# Altium PCB Smart_lockV1.1.PcbDoc (part 1 of 2)
Units mil, origin at the board's own origin, x right, y up, seen from the top; angles counter-clockwise.
Board outline 1820 x 1755 mil, 4 copper layers (Top Layer, Layer 1, Layer 2, Bottom Layer), stack 62.449 mil thick; 74 components, 60 nets, 291 pads, 502 vias.
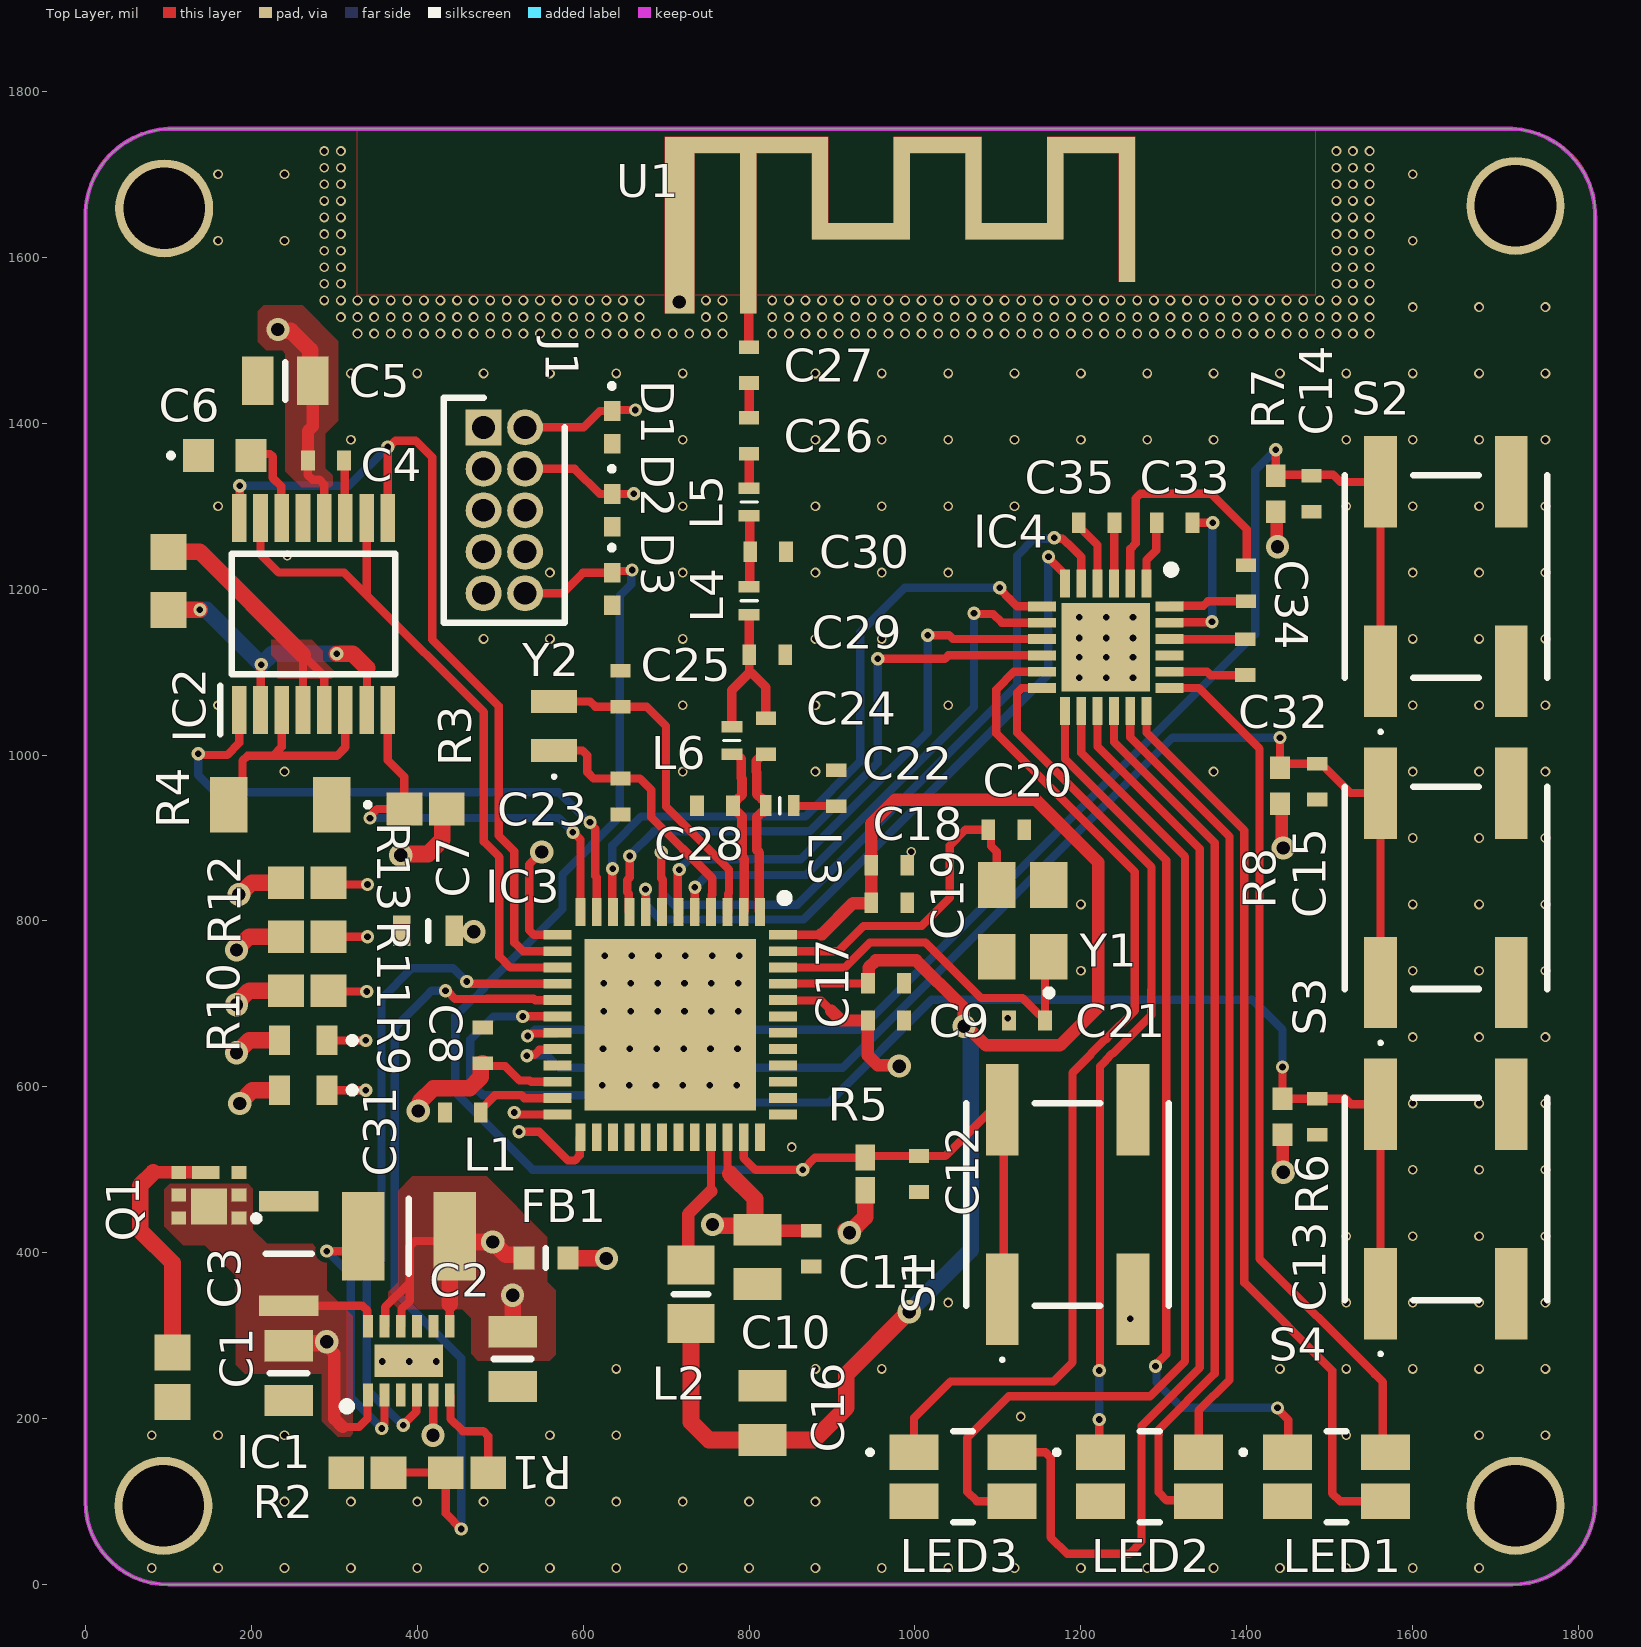
[diagram p0: Top Layer view]
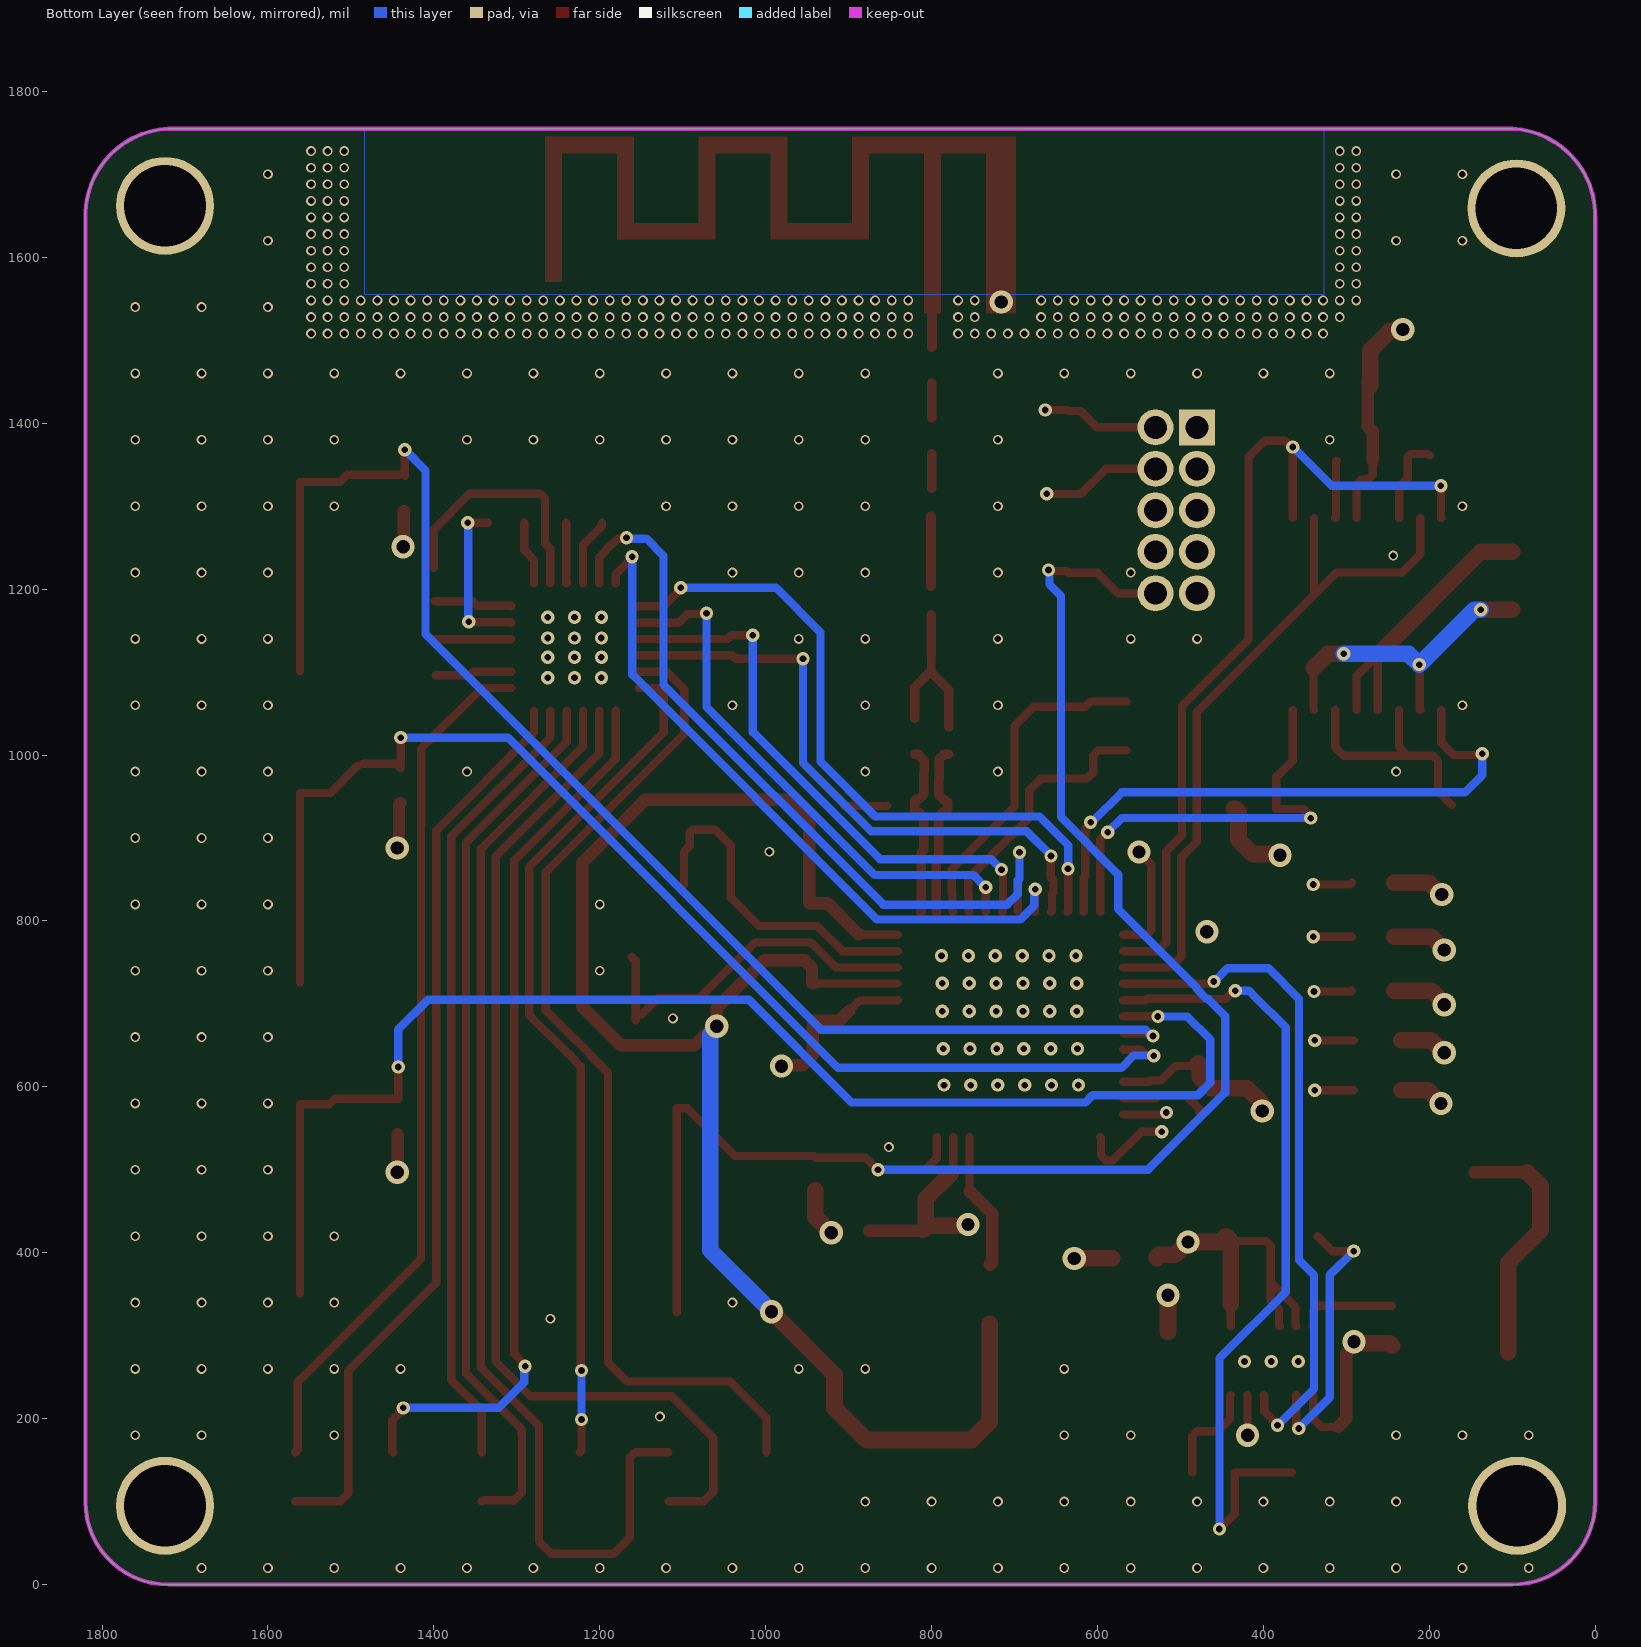
[diagram p1: Bottom Layer view, seen from below]
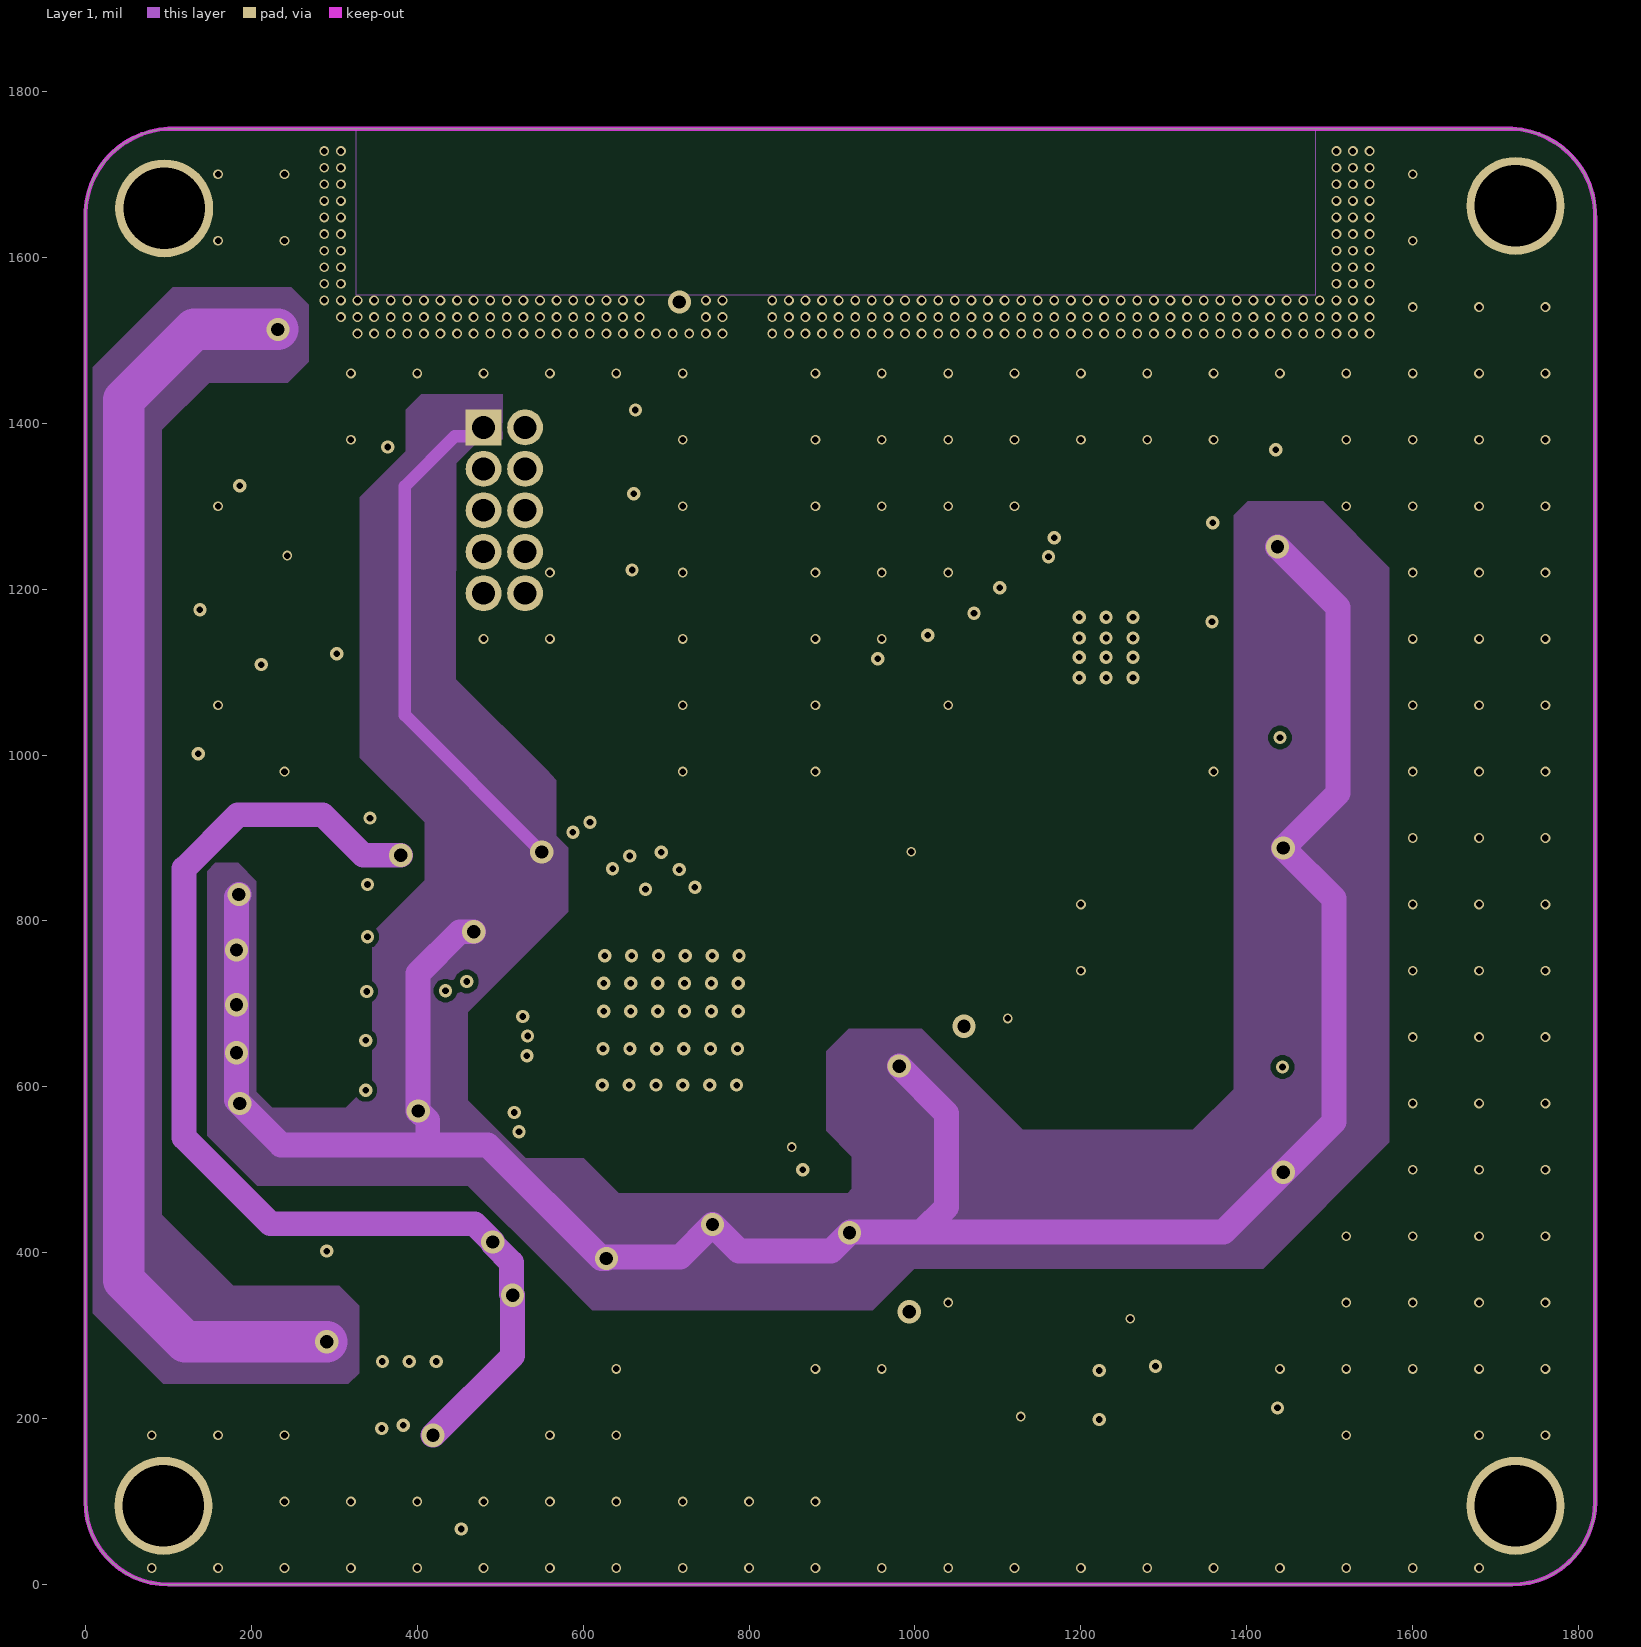
[diagram p2: Layer 1]
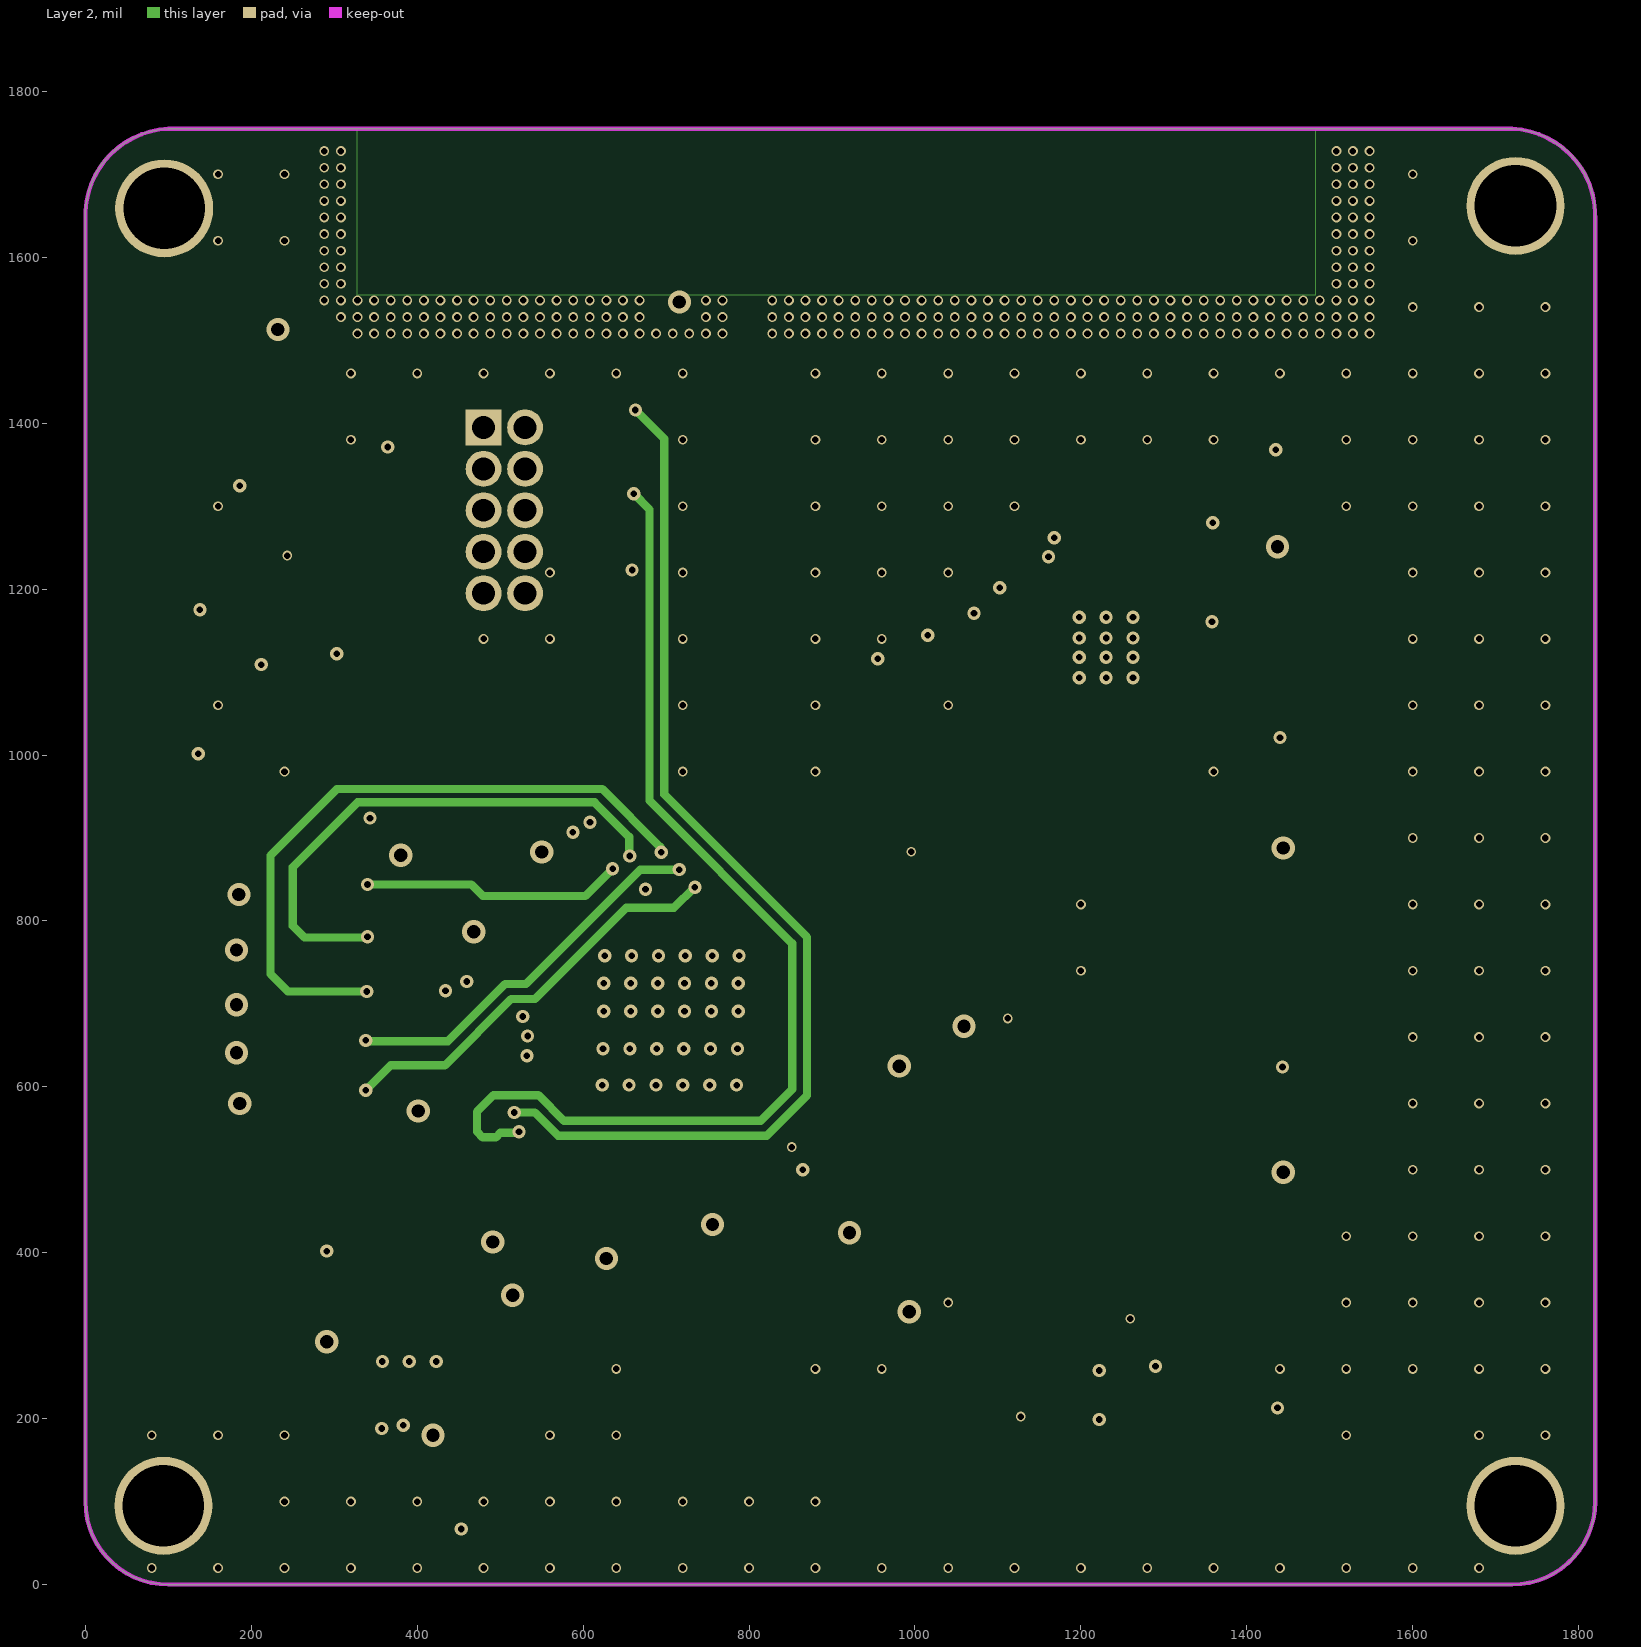
[diagram p3: Layer 2]
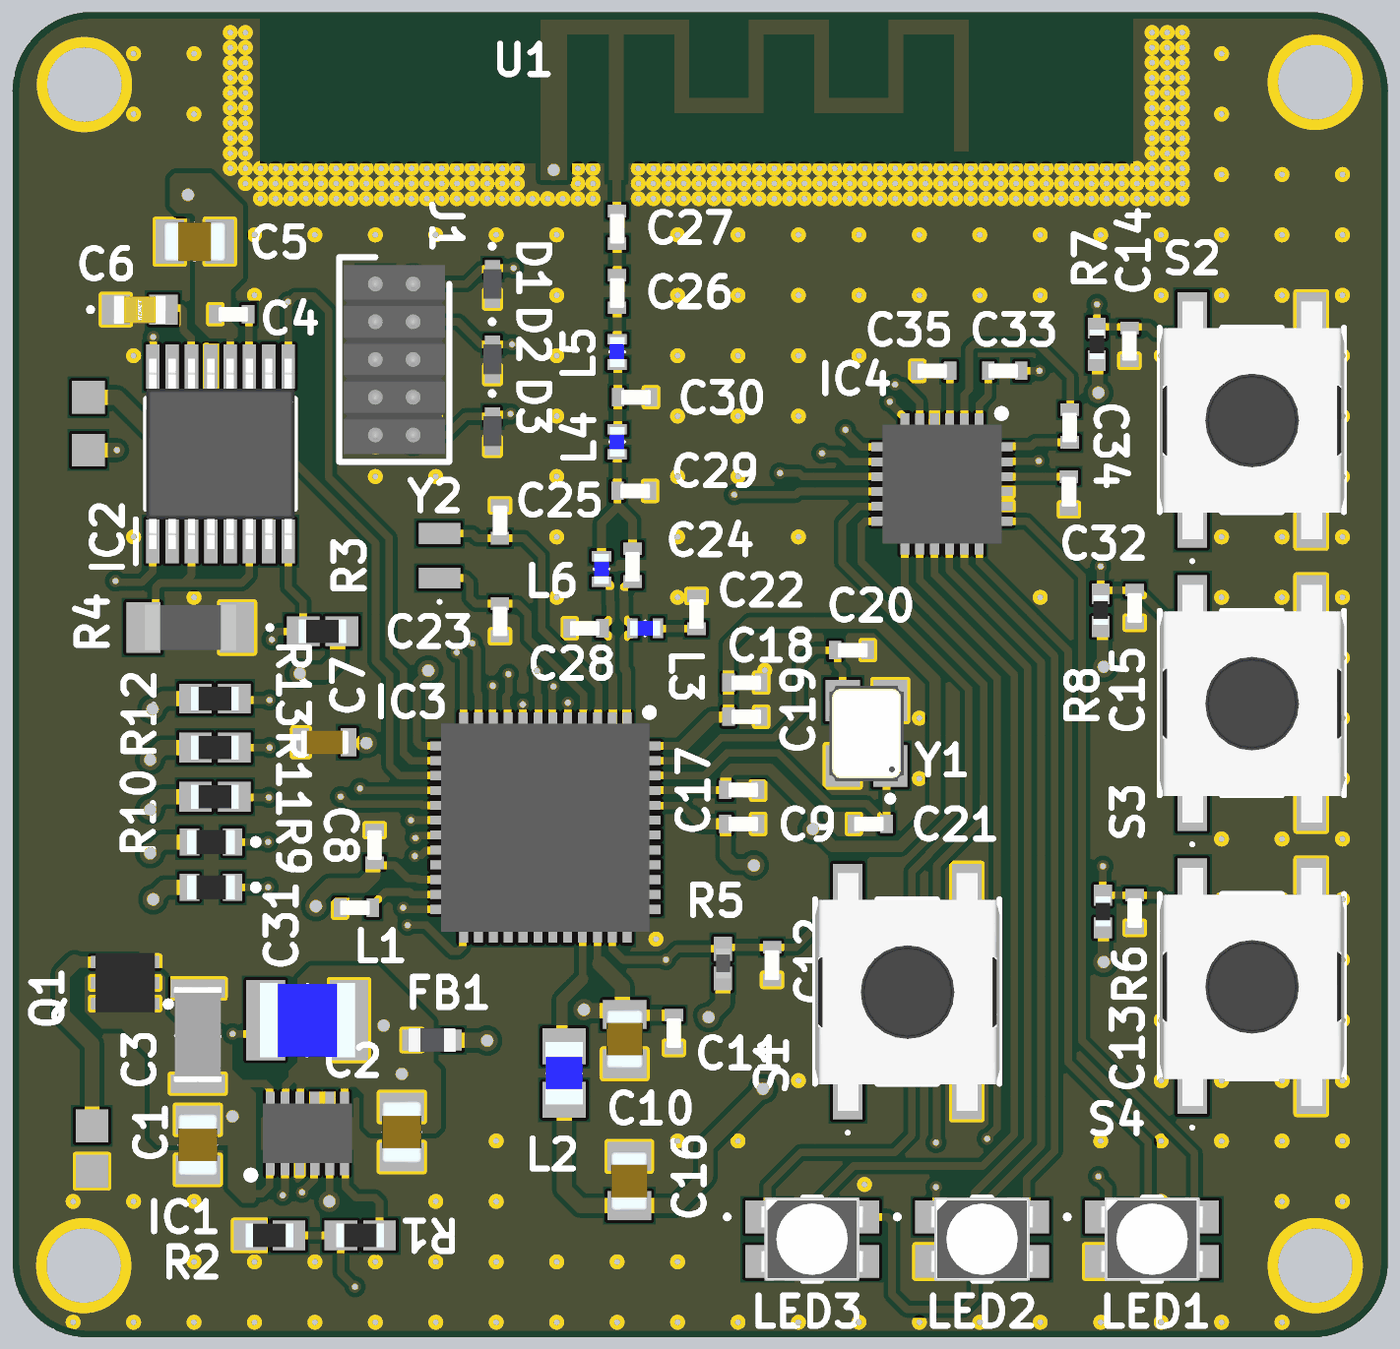
[diagram p4: 3D render of the assembled board from above, using the file's embedded part models]

## Layer stack, top to bottom
Top Solder: solder mask 0.4, Solder Resist, Dk 3.5
Top Layer: signal copper 1.378
Dielectric 2: prepreg 8.2835, PP-006, Dk 4.1
Layer 1: signal copper 0.5984
Dielectric 1: dielectric 41.9291, FR-4, Dk 4.8
Layer 2: signal copper 0.5984
Dielectric 3: prepreg 8.2835, PP-006, Dk 4.1
Bottom Layer: signal copper 1.378
Bottom Solder: solder mask 0.4, Solder Resist, Dk 3.5

## Board outline
1720,0 ccw(c1720,100) 1820,100 1820,1645 ccw(c1715,1650) 1720,1755 100,1755 ccw(c105,1650) 0,1645 0,100 ccw(c100,100) 100,0 200,0

## Design rules (kind name [scope] priority, off if disabled: settings)
Clearance [All] p1: gap=6 ignorepadtopadclearanceinfootprint=TRUE
DiffPairsRouting [All] p1: maxlimit=10 minlimit=8 mostfreqgap=8 toplayer_minwidth=10 toplayer_maxwidth=13 toplayer_prefwidth=10 midlayer1_minwidth=10 midlayer1_maxwidth=13 midlayer1_prefwidth=10 midlayer2_minwidth=10 midlayer2_maxwidth=13 midlayer2_prefwidth=10 bottomlayer_minwidth=10 bottomlayer_maxwidth=13 bottomlayer_prefwidth=10 maxuncoupledlength=500
MinimumSolderMaskSliver [All] p1: minsoldermaskwidth=4
PlaneConnect [All] p1: planeconnectstyle=Direct reliefexpansion=20 reliefentries=4 reliefconductorwidth=10 reliefairgap=10
PolygonConnect PolygonConnect_6 [All vs IsNamedPolygon('6V_L01_P002')] p1: connectstyle=Direct reliefconductorwidth=10 reliefentries=4 polygonreliefangle="90 Angle" airgapwidth=10
PolygonConnect PolygonConnect_5 [All vs IsNamedPolygon('6V_L01_P002')] p2: connectstyle=Direct reliefconductorwidth=10 reliefentries=4 polygonreliefangle="90 Angle" airgapwidth=10
PolygonConnect PolygonConnect_4 [All vs IsNamedPolygon('6V_L01_P002')] p3: connectstyle=Direct reliefconductorwidth=10 reliefentries=4 polygonreliefangle="90 Angle" airgapwidth=10
PolygonConnect PolygonConnect_3 [All vs IsNamedPolygon('6V_L01_P002')] p4: connectstyle=Direct reliefconductorwidth=10 reliefentries=4 polygonreliefangle="90 Angle" airgapwidth=10
PolygonConnect PolygonConnect_2 [All vs IsNamedPolygon('6V_L01_P001')] p5: connectstyle=Direct reliefconductorwidth=10 reliefentries=4 polygonreliefangle="90 Angle" airgapwidth=10
PolygonConnect PolygonConnect_1 [All vs IsNamedPolygon('OUT2_L01_P000')] p6: connectstyle=Direct reliefconductorwidth=10 reliefentries=4 polygonreliefangle="90 Angle" airgapwidth=10
PolygonConnect [All] p7: connectstyle=Direct reliefconductorwidth=10 reliefentries=4 polygonreliefangle="90 Angle" airgapwidth=10
RoutingVias [All] p1: holewidth=8 width=12 viastyle="Through Hole" minholewidth=8 minwidth=12 maxholewidth=28 maxwidth=50
SilkToSolderMaskClearance [IsPad] p1: minsilkscreentomaskgap=4 clearancetoexposedcopper=TRUE
SolderMaskExpansion [All] p1: expansion=4 istentingtop=FALSE
SupplyNets "Schematic Supply Nets_6" [InNet('VDDS')] p1: voltage=0.000
SupplyNets "Schematic Supply Nets_5" [InNet('6V')] p2: voltage=0.000
SupplyNets "Schematic Supply Nets_4" [InNet('GND')] p3: voltage=0.000
SupplyNets "Schematic Supply Nets_3" [InNet('3V')] p4: voltage=0.000
SupplyNets "Schematic Supply Nets_2" [InNet('VDDR')] p5: voltage=0.000
SupplyNets "Schematic Supply Nets_1" [InNet('VBATT')] p6: voltage=0.000
SupplyNets "Schematic Supply Nets" [InNet('VDD_LED')] p7: voltage=0.000
Width [All] p1: maxlimit=60 minlimit=10 preferedwidth=10 minimp=50.000000 maximp=50.000000 favimp=50.000000
26 further rules are at their usual default settings.

## Classes and differential pairs
differential pair RF: +RF_p -RF_n

## Components (designator, comment, footprint, x,y, rotation, side; value= is the part's Value field where it differs from the comment)
C1 "10uF" CAPC2114X145N 245,255 r90 top locked
C2 "10uF" CAPC2114X145N 515,271.93 r90 top
C3 "100uF" CAPC3216X180N 245,399 r270 top locked
C4 "0.01uF" CAPC1005X55N 290,1355 r180 top locked
C5 "10uF" CAPC2114X145N 241,1451 r180 top locked
C6 "2.2uF" C0603 168,1361 r0 top locked
C7 "C1608X5R1A106M080AC" CAPC1608X80N 413,788 r0 top locked
C8 "0.1uF" CAPC1005X55N 479,650 r270 top locked
C9 "0.1uF" CAPC1005X55N 965,680 r180 top locked
C10 "10uF" CAPC2012X145N 810,395 r90 top locked
C11 "0.1uF" CAPC1005X55N 875,405 r90 top locked
C12 "0.1uF" CAPC1005X55N 1005,495 r90 top locked
C13 "2200pF" CAPC1005X55N 1485,564 r90 top locked
C14 "2200pF" CAPC1005X55N 1478,1315 r90 top locked
C15 "2200pF" CAPC1005X55N 1485,968 r90 top locked
C16 "10uF" CAPC2012X145N 816,207 r270 top locked
C17 "0.1uF" CAPC1005X55N 965,725 r180 top locked
C18 "0.1uF" CAPC1005X55N 969,822 r180 top
C19 "885012205037" CAPC1005X55N 969,867 r180 top
C20 "GJM1555C1H1R0BB01J" CAPC1005X55N 1110,910 r180 top locked
C21 "GJM1555C1H1R0BB01J" CAPC1005X55N 1135,680 r0 top locked
C22 "6.8pF" CAPC1005X55N 905,960 r90 top locked
C23 "12pF" CAPC1005X55N 645,950 r90 top locked
C24 "1pF" CAPC1005X55N 820.28,1022.57 r90 top locked
C25 "12pF" CAPC1005X55N 645,1080 r270 top locked
C26 "12pF" CAPC1005X55N 800,1385 r90 top locked
C27 "1.8pF" CAPC1005X55N 800,1470 r90 top locked
C28 "1pF" CAPC1005X55N 759,939 r0 top locked
C29 "GRM1555C1H1R2CA01D" CAPC1005X55N 822,1121 r180 top locked
C30 "1pF" CAPC1005X55N 823,1245 r180 top locked
C31 "1uF" CAPC1005X55N 455,569 r0 top locked
C32 "1uF" CAPC1005X55N 1398,1118 r270 top locked
C33 "0.47uF" CAPC1005X55N 1313,1280 r0 top locked
C34 "0.47uF" CAPC1005X55N 1399,1207 r90 top locked
C35 "1uF" CAPC1005X55N 1219,1280 r0 top locked
D1 "TPD1E10B06DPYR" TPD1E10B06DPYR 635,1395 r270 top locked
D2 "TPD1E10B06DPYR" TPD1E10B06DPYR 635,1295 r270 top locked
D3 "TPD1E10B06DPYR" TPD1E10B06DPYR 635,1200 r270 top locked
FB1 "BLM18HE152SN1D" BLM18SP221SN1B 555.16,393.66 r0 top locked
IC1 "TPS62745DSSR" SON50P200X300X80-13N 390,270 r90 top locked
IC2 "DRV8833PWPR" SOP65P640X120-16N 275,1170 r90 top locked
IC3 "CC2640R2FTWRGZTQ1" QFN50P700X700X100-49N-D 705,675 r270 top locked
IC4 "LP55231SQX_NOPB" QFN50P400X400X80-25N 1230,1130 r270 top locked
J1 "GRPB052VWVN-RC" HDRV10W50P127_2X5_635X340X430P 480,1395 r270 top locked
L1 "4.7uF" INDC3225X270N 390,420 r0 top locked
L2 "10uH" INDC2112X145N 730,350 r270 top locked
L3 "2.4nH" LQG15WH0N7B02D 837,939 r0 top locked
L4 "2nH" LQG15WH0N7B02D 800,1186 r90 top locked
L5 "2nH" LQG15WH0N7B02D 800,1305 r90 top locked
L6 "2.4nH" LQG15WH0N7B02D 779.28,1017.57 r270 top locked
LED1 "ASMB-MTB1-0B3A2" ASMBMTB10B3A2 1508,130 r270 top
LED2 "ASMB-MTB1-0B3A2" ASMBMTB10B3A2 1283,130 r270 top
LED3 "ASMB-MTB1-0B3A2" ASMBMTB10B3A2 1058,130 r270 top
Q1 "CSD25310Q2" CSD17313Q2 148.78,469.44 r90 top locked
R1 "38.3k" RESC1608X55N 460,135 r180 top locked
R2 "30k" RESC1608X55N 340,135 r0 top locked
R3 "1k" RESC1608X55N 410,935 r0 top locked
R4 "0.1R" CSR1206 235,940 r180 top locked
R5 "100k" RESC1005X35N 940,495 r270 top locked
R6 "47.5k" RESC1005X40N 1443,564 r270 top locked
R7 "47.5k" RESC1005X40N 1435,1315 r270 top locked
R8 "47.5k" RESC1005X40N 1440,963 r270 top locked
R9 "4.7k" ERJ3EKF1000V 262.59,596 r180 top
R10 "4.7k" ERJ3EKF1000V 262.59,656 r180 top
R11 "2.2k" RESC1608X55N 267.59,716 r180 top
R12 "10k" RESC1608X55N 267.59,781 r180 top
R13 "10k" RESC1608X55N 267.59,846 r180 top
S1 "EL2_35_20J_LFS" EL23520JLFS 1184,458 r90 top locked
S2 "EL2_35_20J_LFS" EL23520JLFS 1640,1215 r90 top locked
S3 "EL2_35_20J_LFS" EL23520JLFS 1640,840 r90 top locked
S4 "EL2_35_20J_LFS" EL23520JLFS 1640,465 r90 top locked
U1 "2.4 GHz, 50 0hm" ANT_IFA_USB_2_4GHZ_50R 716.32,1532.54 r0 top
Y1 "TSX-3225_24.0000MF20G-AC3" TSX-3225 1130,800 r90 top locked
Y2 "FC-12M32.7680KA-A5" FC12M327680KAA5 565,1035 r90 top locked

## Footprints (in the part's own frame and the unit in brackets; to place one, negate y for a bottom-side part, rotate by r counter-clockwise, add the part's x,y. Pads: shape width x height; smd on the part's side, far side on the other; paste and mask are expansions set on the pad)
ANT_IFA_USB_2_4GHZ_50R [mm]
  rect 5x0.5 smd paste-2539.97 mask+0.102: 1(2.05,5.15)
  rect 0.5x4.9 smd paste-2539.97 mask+0.102: 1(2.1,2.45)
  rect 0.5x2.64 smd paste-2539.97 mask+0.102: 1(4.3,3.58) 1(6.8,3.58) 1(9,3.58) 1(11.5,3.58)
  rect 2x0.5 smd paste-2539.97 mask+0.102: 1(5.55,2.51) 1(10.25,2.51)
  rect 2.7x0.5 smd paste-2539.97 mask+0.102: 1(7.9,5.15) 1(12.6,5.15)
  rect 0.5x3.94 smd paste-2539.97 mask+0.102: 1(13.7,2.93)
  rect 0.9x4.9 smd paste-2539.97 mask+0.102: 2(0,2.45)
  Top Layer region: -0.45,0.001 -0.45,5.4 4.55,5.4 4.55,2.76 6.55,2.76 6.55,2.76 6.55,5.4 9.25,5.4 9.25,2.76 11.25,2.76 11.25,5.4 13.95,5.4 13.95,0.96 13.45,0.96 13.45,4.9 11.747,4.9 11.747,2.26 8.75,2.26 8.75,4.896 8.75,4.9 7.049,4.9 7.05,2.26 4.05,2.26 4.05,4.897 4.05,4.9 2.35,4.9 2.35,0 1.85,0 1.85,4.896 1.85,4.9 0.45,4.9 0.45,0 0.446,0 -0.45,0
ASMBMTB10B3A2 [mm]
  rect 1.1x1.5 smd: 1(-0.75,-1.5) 2(-0.75,1.5) 3(0.75,1.5) 4(0.75,-1.5)
  silkscreen extent -1.4,-2.9 1.4,0.3, body extent -1.4,-1.74 1.4,1.74, height 1.9
BLM18SP221SN1B [mm]
  rect 0.65x0.7 smd: 1(-0.675,0) 2(0.675,0)
  silkscreen extent 0,-0.3 0,0.3, body extent -0.8,-0.4 0.8,0.4, height 0.8
C0603 [mm]
  rect 0.95x1 smd: 1(-0.8,0) 2(0.8,0)
  silkscreen extent -1.7,-0.05 -1.6,0.05, body extent -0.87,-0.48 0.88,0.47, height 0.87
CAPC1005X55N [mm]
  rect 0.42x0.62 smd: 1(-0.55,0) 2(0.55,0)
  body extent -0.55,-0.25 0.45,0.25, height 0.51
CAPC1608X80N [mm]
  rect 0.54x0.94 smd: 1(-0.8,0) 2(0.8,0)
  silkscreen extent 0,-0.3 0,0.3, body extent -0.8,-0.4 0.8,0.4, height 0.8
CAPC2012X145N [mm]
  rect 0.97x1.47 smd: 1(-0.83,0) 2(0.83,0)
  body extent -1,-0.63 1,0.63, height 1.45
CAPC2114X145N [mm]
  rect 0.96x1.49 smd: 1(-0.84,0) 2(0.84,0)
  silkscreen extent 0,-0.58 0,0.58, body extent -1.05,-0.67 1.05,0.67, height 1.45
CAPC3216X180N [mm]
  rect 0.62x1.82 smd: 1(-1.6,0) 2(1.6,0)
  silkscreen extent 0,-0.7 0,0.7, body extent -1.65,-0.8 1.55,0.8, height 1.6
CSD17313Q2 [mm]
  rect 0.4x0.455 smd: 1(-0.7,-0.923) 2(0,-0.923) 3(0.7,-0.923) 4(0.7,0.923) 5(0,0.923) 6(-0.7,0.923)
  rect 0.4x0.85 smd: 7(0.7,0.096)
  rect 1.1x1.1 smd: 8(-0.35,0)
  silkscreen extent -0.78,-1.52 -0.65,-1.39, body extent -1,-1 1,1, height 0.8
CSR1206 [mm]
  rect 1.15x1.7 smd: 1(-1.575,0) 2(1.575,0)
  silkscreen extent -2.73,-0.05 -2.63,0.05, body extent -1.53,-0.78 1.52,0.77, height 0.55
EL23520JLFS [mm]
  rect 2.8x1 smd: 1(-2.9,2) 2(-2.9,-2) 3(2.9,-2) 4(2.9,2)
  silkscreen extent -4.8,-3.1 3.1,3.1, body extent -4.02,-3.11 3.98,3.09, height 3.5
ERJ3EKF1000V [mm]
  rect 0.65x0.9 smd: 1(-0.725,0) 2(0.725,0)
  silkscreen extent -1.6,-0.1 -1.4,0.1, body extent -0.8,-0.4 0.8,0.4, height 0.45
FC12M327680KAA5 [mm]
  rect 0.7x1.4 smd: 1(-0.75,0) 2(0.75,0)
  silkscreen extent -1.6,-0.05 -1.5,0.05
HDRV10W50P127_2X5_635X340X430P [mm]
  rect 1.1x1.1 hole 0.7: 1(0,0)
  round 1.1 hole 0.7: 2(0,1.27) 3(1.27,0) 4(1.27,1.27) 5(2.54,0) 6(2.54,1.27) 7(3.81,0) 8(3.81,1.27) 9(5.08,0) 10(5.08,1.27)
  silkscreen extent -0.9,-1.21 5.98,2.48, body extent -0.64,-1.06 5.71,2.33, height 4.3
INDC2112X145N [mm]
  rect 1.2x1.45 smd: 1(-0.9,0) 2(0.9,0)
  silkscreen extent 0,-0.53 0,0.53, body extent -1.05,-0.63 1.05,0.63, height 1.45
INDC3225X270N [mm]
  rect 1.3x2.7 smd: 1(-1.4,0) 2(1.4,0)
  silkscreen extent 0,-1.15 0,1.15, body extent -1.6,-1.25 1.6,1.25, height 2.7
LQG15WH0N7B02D [mm]
  rect 0.35x0.65 smd: 1(-0.425,0) 2(0.425,0)
  silkscreen extent 0,-0.25 0,0.25, body extent -0.5,-0.25 0.5,0.25, height 0.55
QFN50P400X400X80-25N [mm]
  rect 0.85x0.3 smd: 1(-1.95,1.25) 2(-1.95,0.75) 3(-1.95,0.25) 4(-1.95,-0.25) 5(-1.95,-0.75) 6(-1.95,-1.25) 13(1.95,-1.25) 14(1.95,-0.75) 15(1.95,-0.25) 16(1.95,0.25) 17(1.95,0.75) 18(1.95,1.25)
  rect 0.3x0.85 smd: 7(-1.25,-1.95) 8(-0.75,-1.95) 9(-0.25,-1.95) 10(0.25,-1.95) 11(0.75,-1.95) 12(1.25,-1.95) 19(1.25,1.95) 20(0.75,1.95) 21(0.25,1.95) 22(-0.25,1.95) 23(-0.75,1.95) 24(-1.25,1.95)
  rect 2.7x2.7 smd: 25(0,0)
  silkscreen extent -2.5,1.88 -2.25,2.13, body extent -2,-2 2,2, height 0.8
QFN50P700X700X100-49N-D [mm]
  rect 0.85x0.3 smd: 1(-3.45,2.75) 2(-3.45,2.25) 3(-3.45,1.75) 4(-3.45,1.25) 5(-3.45,0.75) 6(-3.45,0.25) 7(-3.45,-0.25) 8(-3.45,-0.75) 9(-3.45,-1.25) 10(-3.45,-1.75) 11(-3.45,-2.25) 12(-3.45,-2.75) 25(3.45,-2.75) 26(3.45,-2.25) 27(3.45,-1.75) 28(3.45,-1.25) 29(3.45,-0.75) 30(3.45,-0.25) 31(3.45,0.25) 32(3.45,0.75) 33(3.45,1.25) 34(3.45,1.75) 35(3.45,2.25) 36(3.45,2.75)
  rect 0.3x0.85 smd: 13(-2.75,-3.45) 14(-2.25,-3.45) 15(-1.75,-3.45) 16(-1.25,-3.45) 17(-0.75,-3.45) 18(-0.25,-3.45) 19(0.25,-3.45) 20(0.75,-3.45) 21(1.25,-3.45) 22(1.75,-3.45) 23(2.25,-3.45) 24(2.75,-3.45) 37(2.75,3.45) 38(2.25,3.45) 39(1.75,3.45) 40(1.25,3.45) 41(0.75,3.45) 42(0.25,3.45) 43(-0.25,3.45) 44(-0.75,3.45) 45(-1.25,3.45) 46(-1.75,3.45) 47(-2.25,3.45) 48(-2.75,3.45)
  rect 5.25x5.25 smd: 49(0,0)
  silkscreen extent -4,3.38 -3.75,3.63, body extent -3.5,-3.5 3.5,3.5, height 1
RESC1005X35N [mm]
  rect 0.8x0.6 smd: 1(-0.5,0) 2(0.5,0)
  body extent -0.5,-0.25 0.5,0.25, height 0.3
RESC1005X40N [mm]
  rect 0.7x0.6 smd: 1(-0.55,0) 2(0.55,0)
  body extent -0.5,-0.25 0.5,0.25, height 0.4
RESC1608X55N [mm]
  rect 1.1x1 smd: 1(-0.65,0) 2(0.65,0)
  body extent -0.8,-0.4 0.8,0.4, height 0.55
SON50P200X300X80-13N [mm]
  rect 0.7x0.3 smd: 1(-1.05,1.25) 2(-1.05,0.75) 3(-1.05,0.25) 4(-1.05,-0.25) 5(-1.05,-0.75) 6(-1.05,-1.25) 7(1.05,-1.25) 8(1.05,-0.75) 9(1.05,-0.25) 10(1.05,0.25) 11(1.05,0.75) 12(1.05,1.25)
  rect 1x2.1 smd: 13(0,0)
  silkscreen extent -1.52,1.77 -1.28,2.02, body extent -1,-1.5 1,1.5, height 0.8
SOP65P640X120-16N [mm]
  rect 1.475x0.45 smd: 1(-2.938,2.275) 2(-2.938,1.625) 3(-2.938,0.975) 4(-2.938,0.325) 5(-2.938,-0.325) 6(-2.938,-0.975) 7(-2.938,-1.625) 8(-2.938,-2.275) 9(2.938,-2.275) 10(2.938,-1.625) 11(2.938,-0.975) 12(2.938,-0.325) 13(2.938,0.325) 14(2.938,0.975) 15(2.938,1.625) 16(2.938,2.275)
  silkscreen extent -3.67,-2.5 1.85,2.85, body extent -3.2,-2.5 3.2,2.5, height 1.13
TPD1E10B06DPYR [mm]
  rect 0.6x0.5 smd: 1(-0.5,0) 2(0.5,0)
  silkscreen extent -1.32,-0.06 -1.22,0.04, body extent -0.5,-0.3 0.5,0.3, height 0.38
TSX-3225 [mm]
  rect 1.4x1.15 smd: 1(-1.1,-0.8) 2(1.1,-0.8) 3(1.1,0.8) 4(-1.1,0.8)
  silkscreen extent -2.3,-0.9 -2.1,-0.7, body extent -1.61,-1.25 1.59,1.25, height 0.6

## Part data
C1: library part EMK212BB7106MG-T, "10uF,16V,X7R", Manufacturer_Name="TAIYO YUDEN", Mouser Part Number=963-EMK212BB7106MG-T, Datasheet Link=https://datasheet.datasheetarchive.com/originals/distributors/Datasheets-DGA20/25674.pdf, Height=1.45mm, Manufacturer_Part_Number=EMK212BB7106MG-T, Mouser Price/Stock=https://www.mouser.co.uk/ProductDetail/TAIYO-YUDEN/EMK212BB7106MG-T?qs=CNQs48zzdnoVUZzBq71rnA%3D%3D
C2: library part EMK212BB7106MG-T, "Capacitor,10uF,16V", Manufacturer_Name="TAIYO YUDEN", Mouser Part Number=963-EMK212BB7106MG-T, Datasheet Link=https://datasheet.datasheetarchive.com/originals/distributors/Datasheets-DGA20/25674.pdf, Height=1.45mm, Manufacturer_Part_Number=EMK212BB7106MG-T, Mouser Price/Stock=https://www.mouser.co.uk/ProductDetail/TAIYO-YUDEN/EMK212BB7106MG-T?qs=CNQs48zzdnoVUZzBq71rnA%3D%3D
C3: library part C3216X5R1A107M160AC, "Capacitor,100uF,X7R", Manufacturer_Name=TDK, Mouser Part Number=810-C3216X5R1A107M, Arrow Part Number=C3216X5R1A107M160AC, Arrow Price/Stock=https://www.arrow.com/en/products/c3216x5r1a107m160ac/tdk?region=nac, Datasheet Link=https://product.tdk.com/info/en/catalog/datasheets/mlcc_commercial_midvoltage_en.pdf, Height=1.8mm, Manufacturer_Part_Number=C3216X5R1A107M160AC, Mouser Price/Stock=https://www.mouser.co.uk/ProductDetail/TDK/C3216X5R1A107M160AC?qs=NRhsANhppD%252B0MpDu1pf9NA%3D%3D
C4: library part C1005X7R1C103K050BA, "Capacitor,0.01uF", Manufacturer_Name=TDK, Mouser Part Number=810-C1005X7R1C103K, Arrow Part Number=C1005X7R1C103K050BA, Arrow Price/Stock=https://www.arrow.com/en/products/c1005x7r1c103k050ba/tdk?region=nac, Datasheet Link=https://product.tdk.com/info/en/catalog/datasheets/mlcc_commercial_midvoltage_en.pdf, Height=0.55mm, Manufacturer_Part_Number=C1005X7R1C103K050BA, Mouser Price/Stock=https://www.mouser.co.uk/ProductDetail/TDK/C1005X7R1C103K050BA?qs=NRhsANhppD%252Bt7xPr32kpQA%3D%3D
C5: library part EMK212BB7106MG-T, "Capacitor,10uF,16V X7R", Manufacturer_Name="TAIYO YUDEN", Mouser Part Number=963-EMK212BB7106MG-T, Datasheet Link=https://datasheet.datasheetarchive.com/originals/distributors/Datasheets-DGA20/25674.pdf, Height=1.45mm, Manufacturer_Part_Number=EMK212BB7106MG-T, Mouser Price/Stock=https://www.mouser.co.uk/ProductDetail/TAIYO-YUDEN/EMK212BB7106MG-T?qs=CNQs48zzdnoVUZzBq71rnA%3D%3D
C6: library part C0603C225K9PACTU, "Capacitor,2.2uF,X5R,6.3V", Manufacturer_Name=KEMET, Mouser Part Number=80-C0603C225K9P, Arrow Part Number=C0603C225K9PACTU, Arrow Price/Stock=https://www.arrow.com/en/products/c0603c225k9pactu/kemet-corporation?region=nac, Datasheet Link=https://content.kemet.com/datasheets/KEM_C1006_X5R_SMD.pdf, Height=0.87mm, Manufacturer_Part_Number=C0603C225K9PACTU, Mouser Price/Stock=https://www.mouser.co.uk/ProductDetail/KEMET/C0603C225K9PACTU?qs=k9TrThuu1pdUHTgQc%252B%2FY%252Bg%3D%3D
C7: "Capacitor", Manufacturer_Name=TDK, Mouser Part Number=810-C1608X5R1A106M, Arrow Part Number=C1608X5R1A106M080AC, Arrow Price/Stock=https://www.arrow.com/en/products/c1608x5r1a106m080ac/tdk?region=nac, Datasheet Link=https://product.tdk.com/info/en/catalog/datasheets/mlcc_commercial_midvoltage_en.pdf, Height=0.8mm, Manufacturer_Part_Number=C1608X5R1A106M080AC, Mouser Price/Stock=https://www.mouser.co.uk/ProductDetail/TDK/C1608X5R1A106M080AC?qs=NRhsANhppD%2FNXUUBltaPzw%3D%3D
C8 C9: library part GRM155R71A104KA01D, "Capacitor,0.1uF 10V X7R", Manufacturer_Name="Murata Electronics", Mouser Part Number=81-GRM155R71A104KA1D, Arrow Part Number=GRM155R71A104KA01D, Arrow Price/Stock=https://www.arrow.com/en/products/grm155r71a104ka01d/murata-manufacturing?region=nac, Datasheet Link=http://www.murata.com/~/media/webrenewal/support/library/catalog/products/capacitor/mlcc/c02e.pdf, Height=0.55mm, Manufacturer_Part_Number=GRM155R71A104KA01D, Mouser Price/Stock=https://www.mouser.co.uk/ProductDetail/Murata-Electronics/GRM155R71A104KA01D?qs=8YPuuxuUzMIpJ%252BESZ%2Fj8CQ%3D%3D
C10: library part GRM21BR71A106KE51L, "Capacitor,10uF 10V X7R", Manufacturer_Name="Murata Electronics", Mouser Part Number=81-GRM21BR71A106KE51, Arrow Part Number=GRM21BR71A106KE51L, Arrow Price/Stock=https://www.arrow.com/en/products/grm21br71a106ke51l/murata-manufacturing, Datasheet Link=http://www.murata.com/~/media/webrenewal/support/library/catalog/products/capacitor/mlcc/c02e.pdf, Height=1.45mm, Manufacturer_Part_Number=GRM21BR71A106KE51L, Mouser Price/Stock=https://www.mouser.co.uk/ProductDetail/Murata-Electronics/GRM21BR71A106KE51L?qs=kHCDrmfBqSAdNFLacabF8w%3D%3D
C11: library part GRM155R71A104KA01D, "Capacitor,01uF 10V X7R", Manufacturer_Name="Murata Electronics", Mouser Part Number=81-GRM155R71A104KA1D, Arrow Part Number=GRM155R71A104KA01D, Arrow Price/Stock=https://www.arrow.com/en/products/grm155r71a104ka01d/murata-manufacturing?region=nac, Datasheet Link=http://www.murata.com/~/media/webrenewal/support/library/catalog/products/capacitor/mlcc/c02e.pdf, Height=0.55mm, Manufacturer_Part_Number=GRM155R71A104KA01D, Mouser Price/Stock=https://www.mouser.co.uk/ProductDetail/Murata-Electronics/GRM155R71A104KA01D?qs=8YPuuxuUzMIpJ%252BESZ%2Fj8CQ%3D%3D
C12: library part CGA2B3X7R1E104K050BB, "Capacitor 0.1uF 25V", Manufacturer_Name=TDK, Mouser Part Number=810-CGA2B3X7R1E104K, Arrow Part Number=CGA2B3X7R1E104K050BB, Arrow Price/Stock=https://www.arrow.com/en/products/cga2b3x7r1e104k050bb/tdk, Datasheet Link=http://docs-europe.electrocomponents.com/webdocs/14e9/0900766b814e9125.pdf, Height=0.55mm, Manufacturer_Part_Number=CGA2B3X7R1E104K050BB, Mouser Price/Stock=https://www.mouser.co.uk/ProductDetail/TDK/CGA2B3X7R1E104K050BB?qs=NRhsANhppD8vfw6RTbl%2FmA%3D%3D
C13: library part C1005X7R1H222K050BA, "Capacitor 2200pF 50V", Manufacturer_Name=TDK, Mouser Part Number=810-C1005X7R1H222K, Datasheet Link=https://product.tdk.com/info/en/catalog/datasheets/mlcc_commercial_midvoltage_en.pdf, Height=0.55mm, Manufacturer_Part_Number=C1005X7R1H222K050BA, Mouser Price/Stock=https://www.mouser.co.uk/ProductDetail/TDK/C1005X7R1H222K050BA?qs=NRhsANhppD9DKOaxmnLFog%3D%3D
C14 C15: library part C1005X7R1H222K050BA, "Capacitor", Manufacturer_Name=TDK, Mouser Part Number=810-C1005X7R1H222K, Datasheet Link=https://product.tdk.com/info/en/catalog/datasheets/mlcc_commercial_midvoltage_en.pdf, Height=0.55mm, Manufacturer_Part_Number=C1005X7R1H222K050BA, Mouser Price/Stock=https://www.mouser.co.uk/ProductDetail/TDK/C1005X7R1H222K050BA?qs=NRhsANhppD9DKOaxmnLFog%3D%3D
C16: library part GRM21BR71A106KE51L, "Capacitor 10uF 10V X7R", Manufacturer_Name="Murata Electronics", Mouser Part Number=81-GRM21BR71A106KE51, Arrow Part Number=GRM21BR71A106KE51L, Arrow Price/Stock=https://www.arrow.com/en/products/grm21br71a106ke51l/murata-manufacturing, Datasheet Link=http://www.murata.com/~/media/webrenewal/support/library/catalog/products/capacitor/mlcc/c02e.pdf, Height=1.45mm, Manufacturer_Part_Number=GRM21BR71A106KE51L, Mouser Price/Stock=https://www.mouser.co.uk/ProductDetail/Murata-Electronics/GRM21BR71A106KE51L?qs=kHCDrmfBqSAdNFLacabF8w%3D%3D
C17 C18: library part GRM155R71A104KA01D, "Capacitor 0.1uF 10V X7R", Manufacturer_Name="Murata Electronics", Mouser Part Number=81-GRM155R71A104KA1D, Arrow Part Number=GRM155R71A104KA01D, Arrow Price/Stock=https://www.arrow.com/en/products/grm155r71a104ka01d/murata-manufacturing?region=nac, Datasheet Link=http://www.murata.com/~/media/webrenewal/support/library/catalog/products/capacitor/mlcc/c02e.pdf, Height=0.55mm, Manufacturer_Part_Number=GRM155R71A104KA01D, Mouser Price/Stock=https://www.mouser.co.uk/ProductDetail/Murata-Electronics/GRM155R71A104KA01D?qs=8YPuuxuUzMIpJ%252BESZ%2Fj8CQ%3D%3D
C19: "Capacitor", Manufacturer_Name="Wurth Elektronik", Mouser Part Number=710-885012205037, Datasheet Link=https://katalog.we-online.com/pbs/datasheet/885012205037.pdf, Height=0.55mm, Manufacturer_Part_Number=885012205037, Mouser Price/Stock=https://www.mouser.co.uk/ProductDetail/Wurth-Elektronik/885012205037?qs=0KOYDY2FL2%252B%2FS6qIxdvsOA%3D%3D
C20 C21: "Capacitor", Manufacturer_Name="Murata Electronics", Mouser Part Number=81-GJM1555C1H1R0BB1J, Arrow Part Number=GJM1555C1H1R0BB01J, Arrow Price/Stock=https://www.arrow.com/en/products/gjm1555c1h1r0bb01j/murata-manufacturing, Datasheet Link=https://psearch.en.murata.com/capacitor/product/GJM1555C1H1R0BB01%23.html, Height=0.55mm, Manufacturer_Part_Number=GJM1555C1H1R0BB01J, Mouser Price/Stock=https://www.mouser.co.uk/ProductDetail/Murata-Electronics/GJM1555C1H1R0BB01J?qs=QDXoN8f0aYKhYDjDsFjbQw%3D%3D
C22: library part GRM1555C1H6R8CA01D, "6.8pF Capacitor 50V", Manufacturer_Name="Murata Electronics", Mouser Part Number=81-GRM1555C1H6R8CA1D, Arrow Part Number=GRM1555C1H6R8CA01D, Arrow Price/Stock=https://www.arrow.com/en/products/grm1555c1h6r8ca01d/murata-manufacturing, Datasheet Link=http://www.murata.com/~/media/webrenewal/support/library/catalog/products/capacitor/mlcc/c02e.pdf, Height=0.55mm, Manufacturer_Part_Number=GRM1555C1H6R8CA01D, Mouser Price/Stock=https://www.mouser.co.uk/ProductDetail/Murata-Electronics/GRM1555C1H6R8CA01D?qs=q312vENifzChk4Wux6WqXA%3D%3D
C23: library part GRM1555C1H120JA01D, "Capacitor 12pF 50V", Manufacturer_Name="Murata Electronics", Mouser Part Number=81-GRM1555C1H120JA1D, Arrow Part Number=GRM1555C1H120JA01D, Arrow Price/Stock=https://www.arrow.com/en/products/grm1555c1h120ja01d/murata-manufacturing?region=nac, Datasheet Link=http://www.murata.com/~/media/webrenewal/support/library/catalog/products/capacitor/mlcc/c02e.pdf, Height=0.55mm, Manufacturer_Part_Number=GRM1555C1H120JA01D, Mouser Price/Stock=https://www.mouser.co.uk/ProductDetail/Murata-Electronics/GRM1555C1H120JA01D?qs=to8XolpOzrOCHudLswyzbw%3D%3D
C24: library part GJM1555C1H1R0BB01J, "Capacitor 1pF 50V", Manufacturer_Name="Murata Electronics", Mouser Part Number=81-GJM1555C1H1R0BB1J, Arrow Part Number=GJM1555C1H1R0BB01J, Arrow Price/Stock=https://www.arrow.com/en/products/gjm1555c1h1r0bb01j/murata-manufacturing, Datasheet Link=https://psearch.en.murata.com/capacitor/product/GJM1555C1H1R0BB01%23.html, Height=0.55mm, Manufacturer_Part_Number=GJM1555C1H1R0BB01J, Mouser Price/Stock=https://www.mouser.co.uk/ProductDetail/Murata-Electronics/GJM1555C1H1R0BB01J?qs=QDXoN8f0aYKhYDjDsFjbQw%3D%3D
C25: library part GRM1555C1H120JA01D, "Capacitor 12 pF 50V", Manufacturer_Name="Murata Electronics", Mouser Part Number=81-GRM1555C1H120JA1D, Arrow Part Number=GRM1555C1H120JA01D, Arrow Price/Stock=https://www.arrow.com/en/products/grm1555c1h120ja01d/murata-manufacturing?region=nac, Datasheet Link=http://www.murata.com/~/media/webrenewal/support/library/catalog/products/capacitor/mlcc/c02e.pdf, Height=0.55mm, Manufacturer_Part_Number=GRM1555C1H120JA01D, Mouser Price/Stock=https://www.mouser.co.uk/ProductDetail/Murata-Electronics/GRM1555C1H120JA01D?qs=to8XolpOzrOCHudLswyzbw%3D%3D
C26: library part GRM1555C1H120JA01D, "Capacitor", Manufacturer_Name="Murata Electronics", Mouser Part Number=81-GRM1555C1H120JA1D, Arrow Part Number=GRM1555C1H120JA01D, Arrow Price/Stock=https://www.arrow.com/en/products/grm1555c1h120ja01d/murata-manufacturing?region=nac, Datasheet Link=http://www.murata.com/~/media/webrenewal/support/library/catalog/products/capacitor/mlcc/c02e.pdf, Height=0.55mm, Manufacturer_Part_Number=GRM1555C1H120JA01D, Mouser Price/Stock=https://www.mouser.co.uk/ProductDetail/Murata-Electronics/GRM1555C1H120JA01D?qs=to8XolpOzrOCHudLswyzbw%3D%3D
C27: library part GRM1555C1H1R8CA01D, "Capacitor", Manufacturer_Name="Murata Electronics", Mouser Part Number=81-GRM1555C1H1R8CA1D, Arrow Part Number=GRM1555C1H1R8CA01D, Arrow Price/Stock=https://www.arrow.com/en/products/grm1555c1h1r8ca01d/murata-manufacturing?region=nac, Datasheet Link=http://www.murata.com/~/media/webrenewal/support/library/catalog/products/capacitor/mlcc/c02e.pdf, Height=0.55mm, Manufacturer_Part_Number=GRM1555C1H1R8CA01D, Mouser Price/Stock=https://www.mouser.co.uk/ProductDetail/Murata-Electronics/GRM1555C1H1R8CA01D?qs=4k9rjS6ZRl5xsfkvNAudjg%3D%3D
C28: library part GJM1555C1H1R0BB01J, "Capacitor 1pF 5V", Manufacturer_Name="Murata Electronics", Mouser Part Number=81-GJM1555C1H1R0BB1J, Arrow Part Number=GJM1555C1H1R0BB01J, Arrow Price/Stock=https://www.arrow.com/en/products/gjm1555c1h1r0bb01j/murata-manufacturing, Datasheet Link=https://psearch.en.murata.com/capacitor/product/GJM1555C1H1R0BB01%23.html, Height=0.55mm, Manufacturer_Part_Number=GJM1555C1H1R0BB01J, Mouser Price/Stock=https://www.mouser.co.uk/ProductDetail/Murata-Electronics/GJM1555C1H1R0BB01J?qs=QDXoN8f0aYKhYDjDsFjbQw%3D%3D
C29: "Capacitor", Manufacturer_Name="Murata Electronics", Mouser Part Number=81-GRM1555C1H1R2CA1D, Datasheet Link=http://www.murata.com/~/media/webrenewal/support/library/catalog/products/capacitor/mlcc/c02e.pdf, Height=0.55mm, Manufacturer_Part_Number=GRM1555C1H1R2CA01D, Mouser Price/Stock=https://www.mouser.com/Search/ProductDetail.aspx?qs=to8XolpOzrP6nx%252b3wqoCBw%3d%3d
C30: library part GJM1555C1H1R0BB01J, "Capacitor 1pF", Manufacturer_Name="Murata Electronics", Mouser Part Number=81-GJM1555C1H1R0BB1J, Arrow Part Number=GJM1555C1H1R0BB01J, Arrow Price/Stock=https://www.arrow.com/en/products/gjm1555c1h1r0bb01j/murata-manufacturing, Datasheet Link=https://psearch.en.murata.com/capacitor/product/GJM1555C1H1R0BB01%23.html, Height=0.55mm, Manufacturer_Part_Number=GJM1555C1H1R0BB01J, Mouser Price/Stock=https://www.mouser.co.uk/ProductDetail/Murata-Electronics/GJM1555C1H1R0BB01J?qs=QDXoN8f0aYKhYDjDsFjbQw%3D%3D
C31 C35: library part GRM155R61A105KE15D, "Capacitor 1uF 10V X5R", Manufacturer_Name="Murata Electronics", Mouser Part Number=81-GRM155R61A105KE15, Arrow Part Number=GRM155R61A105KE15D, Arrow Price/Stock=https://www.arrow.com/en/products/grm155r61a105ke15d/murata-manufacturing?region=europe, Datasheet Link=http://www.murata.com/~/media/webrenewal/support/library/catalog/products/capacitor/mlcc/c02e.pdf, Height=0.55mm, Manufacturer_Part_Number=GRM155R61A105KE15D, Mouser Price/Stock=https://www.mouser.co.uk/ProductDetail/Murata-Electronics/GRM155R61A105KE15D?qs=mjAxHPhY7UcmPekRqw%2FAPA%3D%3D
C32: library part GRM155R61A105KE15D, "Capacitor 1uF 10V", Manufacturer_Name="Murata Electronics", Mouser Part Number=81-GRM155R61A105KE15, Arrow Part Number=GRM155R61A105KE15D, Arrow Price/Stock=https://www.arrow.com/en/products/grm155r61a105ke15d/murata-manufacturing?region=europe, Datasheet Link=http://www.murata.com/~/media/webrenewal/support/library/catalog/products/capacitor/mlcc/c02e.pdf, Height=0.55mm, Manufacturer_Part_Number=GRM155R61A105KE15D, Mouser Price/Stock=https://www.mouser.co.uk/ProductDetail/Murata-Electronics/GRM155R61A105KE15D?qs=mjAxHPhY7UcmPekRqw%2FAPA%3D%3D
C33 C34: library part C1005X5R1A474K050BB, "Capacitor 0.47uF 10V X5R", Manufacturer_Name=TDK, Mouser Part Number=810-C1005X5R1A474K, Datasheet Link=https://product.tdk.com/info/en/catalog/datasheets/mlcc_commercial_midvoltage_en.pdf, Height=0.55mm, Manufacturer_Part_Number=C1005X5R1A474K050BB, Mouser Price/Stock=https://www.mouser.com/Search/Refine.aspx?Keyword=810-C1005X5R1A474K
D1 D2 D3: "TVS Diode (Bi-directional)", Manufacturer_Name="Texas Instruments", Mouser Part Number=595-TPD1E10B06DPYR, Arrow Part Number=TPD1E10B06DPYR, Arrow Price/Stock=https://www.arrow.com/en/products/tpd1e10b06dpyr/texas-instruments?region=nac, Datasheet Link=https://www.ti.com/lit/ds/symlink/tpd1e10b06.pdf?HQS=TI-null-null-mousermode-df-pf-null-wwe&ts=1599077798252&ref_url=https%253A%252F%252Fwww.mouser.com%252F, Height=0.45mm, Manufacturer_Part_Number=TPD1E10B06DPYR, Mouser Price/Stock=https://www.mouser.co.uk/ProductDetail/Texas-Instruments/TPD1E10B06DPYR?qs=UFc95S4Z4CaJYpQ4xqTc0g%3D%3D
FB1: "Ferrite Bead", Manufacturer_Name="Murata Electronics", Mouser Part Number=81-BLM18HE152SN1D, Arrow Part Number=BLM18HE152SN1D, Arrow Price/Stock=https://www.arrow.com/en/products/blm18he152sn1d/murata-manufacturing?utm_currency=USD&region=nac, Datasheet Link=http://www.murata.com/~/media/webrenewal/support/library/catalog/products/emc/emifil/c31e.ashx?la=en-gb, Height=0.95mm, Manufacturer_Part_Number=BLM18HE152SN1D, Mouser Price/Stock=https://www.mouser.co.uk/ProductDetail/Murata-Electronics/BLM18HE152SN1D?qs=vNc2DXHODiLhczkT1FKS1Q%3D%3D
IC1: "Integrated Circuit", Manufacturer_Name="Texas Instruments", Mouser Part Number=595-TPS62745DSSR, Arrow Part Number=TPS62745DSSR, Arrow Price/Stock=https://www.arrow.com/en/products/tps62745dssr/texas-instruments?region=nac, Datasheet Link=http://www.ti.com/lit/gpn/tps62745, Height=0.8mm, Manufacturer_Part_Number=TPS62745DSSR, Mouser Price/Stock=https://www.mouser.co.uk/ProductDetail/Texas-Instruments/TPS62745DSSR?qs=cGEy3R83DS9Bx52nwzd43Q%3D%3D
IC2: "Integrated Circuit", Manufacturer_Name="Texas Instruments", Mouser Part Number=595-DRV8833PWPR, Arrow Part Number=DRV8833PWPR, Arrow Price/Stock=https://www.arrow.com/en/products/drv8833pwpr/texas-instruments?utm_currency=USD&region=europe, Datasheet Link=http://www.ti.com/lit/gpn/drv8833, Height=1.2mm, Manufacturer_Part_Number=DRV8833PWPR, Mouser Price/Stock=https://www.mouser.co.uk/ProductDetail/Texas-Instruments/DRV8833PWPR?qs=luhu8ESwuKxT62RV9jrJTg%3D%3D
IC3: "Integrated Circuit", Manufacturer_Name="Texas Instruments", Mouser Part Number=595-2640R2FTWRGZTQ1, Arrow Part Number=CC2640R2FTWRGZTQ1, Arrow Price/Stock=https://www.arrow.com/en/products/cc2640r2ftwrgztq1/texas-instruments?region=nac, Datasheet Link=https://mouser.componentsearchengine.com/Datasheets/2/CC2640R2FTWRGZTQ1.pdf, Height=1mm, Manufacturer_Part_Number=CC2640R2FTWRGZTQ1, Mouser Price/Stock=https://www.mouser.co.uk/ProductDetail/Texas-Instruments/CC2640R2FTWRGZTQ1?qs=6BVwEky2YVwde1NefGxXhA%3D%3D
IC4: "Integrated Circuit", Arrow Part Number=LP55231SQX/NOPB, Manufacturer_Name="Texas Instruments", Mouser Part Number=595-LP55231SQX/NOPB, Arrow Price/Stock=https://www.arrow.com/en/products/lp55231sqxnopb/texas-instruments?region=nac, Datasheet Link=http://www.ti.com/lit/gpn/lp55231, Height=0.8mm, Manufacturer_Part_Number=LP55231SQX/NOPB, Mouser Price/Stock=https://www.mouser.co.uk/ProductDetail/Texas-Instruments/LP55231SQX-NOPB?qs=HF2YfZwisE8IcIRPR19gTw%3D%3D
J1: "Connector", Manufacturer_Name=Sullins, Datasheet Link=https://media.digikey.com/pdf/Data%20Sheets/Sullins%20PDFs/GRPB_%20_2VWVN-RC%2010954-C.pdf, Height=4.3mm, Manufacturer_Part_Number=GRPB052VWVN-RC
L1: library part CBC3225T4R7MRV, "Inductor,4.7uF,1.01A,0.1ohm", Manufacturer_Name="TAIYO YUDEN", Mouser Part Number=963-CBC3225T4R7MRV, Arrow Part Number=CBC3225T4R7MRV, Arrow Price/Stock=https://www.arrow.com/en/products/cbc3225t4r7mrv/taiyo-yuden, Datasheet Link=https://www.arrow.com/en/products/cbc3225t4r7mrv/taiyo-yuden, Height=2.7mm, Manufacturer_Part_Number=CBC3225T4R7MRV, Mouser Price/Stock=https://www.mouser.co.uk/ProductDetail/TAIYO-YUDEN/CBC3225T4R7MRV?qs=DpxmIIQLg%252BP760DvOSan2w%3D%3D
L2: library part CKS2125100M-T, "Inductor,10uH", Manufacturer_Name="TAIYO YUDEN", Mouser Part Number=963-CKS2125100M-T, Datasheet Link=http://www.farnell.com/datasheets/1913121.pdf, Height=1.45mm, Manufacturer_Part_Number=CKS2125100M-T, Mouser Price/Stock=https://www.mouser.co.uk/ProductDetail/TAIYO-YUDEN/CKS2125100M-T?qs=I6KAKw0tg2zHq294SAdJZA%3D%3D
L3: library part LQG15HN2N4S02D, "Inductor 2.4 nH", Manufacturer_Name="Murata Electronics", Mouser Part Number=81-LQG15HN2N4S02D, Arrow Part Number=LQG15HN2N4S02D, Arrow Price/Stock=https://www.arrow.com/en/products/lqg15hn2n4s02d/murata-manufacturing, Datasheet Link=https://psearch.en.murata.com/inductor/product/LQG15HN2N4S02%23.html, Height=0.55mm, Manufacturer_Part_Number=LQG15HN2N4S02D, Mouser Price/Stock=https://www.mouser.com/Search/Refine.aspx?Keyword=81-LQG15HN2N4S02D
L4 L5: library part LQG15HS2N0S02D, "Inductor", Manufacturer_Name="Murata Electronics", Mouser Part Number=81-LQG15HS2N0S02D, Arrow Part Number=LQG15HS2N0S02D, Arrow Price/Stock=https://www.arrow.com/en/products/lqg15hs2n0s02d/murata-manufacturing?region=nac, Datasheet Link=https://psearch.en.murata.com/inductor/product/LQG15HS2N0S02%23.html, Height=0.55mm, Manufacturer_Part_Number=LQG15HS2N0S02D, Mouser Price/Stock=https://www.mouser.co.uk/ProductDetail/Murata-Electronics/LQG15HS2N0S02D?qs=z7wylDbq%2FU6uWxpTRPm4gA%3D%3D
L6: library part LQG15HN2N4S02D, "Inductor", Manufacturer_Name="Murata Electronics", Mouser Part Number=81-LQG15HN2N4S02D, Arrow Part Number=LQG15HN2N4S02D, Arrow Price/Stock=https://www.arrow.com/en/products/lqg15hn2n4s02d/murata-manufacturing, Datasheet Link=https://psearch.en.murata.com/inductor/product/LQG15HN2N4S02%23.html, Height=0.55mm, Manufacturer_Part_Number=LQG15HN2N4S02D, Mouser Price/Stock=https://www.mouser.com/Search/Refine.aspx?Keyword=81-LQG15HN2N4S02D
LED1 LED2 LED3: "LED", Manufacturer_Name="Avago Technologies", Mouser Part Number=630-ASMB-MTB1-0B3A2, Datasheet Link=https://docs.broadcom.com/doc/AV02-4194EN, Height=2.1mm, Manufacturer_Part_Number=ASMB-MTB1-0B3A2, Mouser Price/Stock=https://www.mouser.co.uk/ProductDetail/Broadcom-Avago/ASMB-MTB1-0B3A2?qs=pUKx8fyJudDzsc2Rt%2Fv8dg%3D%3D
Q1: "MOSFET (P-Channel)", Manufacturer_Name="Texas Instruments", Mouser Part Number=595-CSD25310Q2, Arrow Part Number=CSD25310Q2, Arrow Price/Stock=https://www.arrow.com/en/products/csd25310q2/texas-instruments?region=nac, Datasheet Link=http://www.ti.com/lit/gpn/csd25310q2, Manufacturer_Part_Number=CSD25310Q2, Mouser Price/Stock=https://www.mouser.co.uk/ProductDetail/Texas-Instruments/CSD25310Q2?qs=%252BFzhjShcsaLmTjZr5cnj9w%3D%3D
R1: library part RC0603FR-0738K3L, "Resistor,38.3k", Manufacturer_Name=KEMET, Datasheet Link=http://www.yageo.com/documents/recent/PYu-RC0603_51_RoHS_L_v5.pdf, Height=0.55mm, Manufacturer_Part_Number=RC0603FR-0738K3L
R2: library part ERJ-3EKF3002V, "Resistor,30k,1%", Manufacturer_Name=Panasonic, Mouser Part Number=667-ERJ-3EKF3002V, Arrow Part Number=ERJ-3EKF3002V, Arrow Price/Stock=https://www.arrow.com/en/products/erj3ekf3002v/panasonic?region=nac, Datasheet Link=http://industrial.panasonic.com/cdbs/www-data/pdf/RDA0000/AOA0000C86.pdf, Height=0.55mm, Manufacturer_Part_Number=ERJ-3EKF3002V, Mouser Price/Stock=https://www.mouser.co.uk/ProductDetail/Panasonic/ERJ-3EKF3002V?qs=MVjVSMjNRMoByeEjjMcfzA%3D%3D
R3: library part ERJ-3EKF3002V, "Resistor,1k", Manufacturer_Name=Panasonic, Mouser Part Number=667-ERJ-3EKF3002V, Arrow Part Number=ERJ-3EKF3002V, Arrow Price/Stock=https://www.arrow.com/en/products/erj3ekf3002v/panasonic?region=nac, Datasheet Link=http://industrial.panasonic.com/cdbs/www-data/pdf/RDA0000/AOA0000C86.pdf, Height=0.55mm, Manufacturer_Part_Number=ERJ-3EKF3002V, Mouser Price/Stock=https://www.mouser.co.uk/ProductDetail/Panasonic/ERJ-3EKF3002V?qs=MVjVSMjNRMoByeEjjMcfzA%3D%3D
R4: library part CSR1206FKR100, "Resistor,0.1R", Manufacturer_Name="Stackpole Electronics", Mouser Part Number=708-CSR1206FKR100, Datasheet Link=https://cs.seielect.com/catalog/SEI-CSR_CSRN.pdf, Height=0.65mm, Manufacturer_Part_Number=CSR1206FKR100, Mouser Price/Stock=https://www.mouser.co.uk/ProductDetail/SEI-Stackpole/CSR1206FKR100?qs=FESYatJ8odJJ%2Fwfc%252BjDDcQ%3D%3D
R5: library part RMCF0402FT100K, "Resistor", Manufacturer_Name="Stackpole Electronics", Mouser Part Number=708-RMCF0402FT100K, Arrow Part Number=RMCF0402FT100K, Arrow Price/Stock=https://www.arrow.com/en/products/rmcf0402ft100k/stackpole-electronics?region=asia, Datasheet Link=https://cs.seielect.com/catalog/SEI-RMCF_RMCP.pdf, Height=0.35mm, Manufacturer_Part_Number=RMCF0402FT100K, Mouser Price/Stock=https://www.mouser.co.uk/ProductDetail/SEI-Stackpole/RMCF0402FT100K?qs=FESYatJ8odIlocPFcyIG5Q%3D%3D
R6 R7 R8: library part CRCW040247K5FKED, "Resistor", Manufacturer_Name=Vishay, Mouser Part Number=71-CRCW0402-47.5K-E3, Arrow Part Number=CRCW040247K5FKED, Arrow Price/Stock=https://www.arrow.com/en/products/crcw040247k5fked/vishay, Datasheet Link=http://www.vishay.com/docs/20035/dcrcwe3.pdf, Height=0.4mm, Manufacturer_Part_Number=CRCW040247K5FKED, Mouser Price/Stock=https://www.mouser.co.uk/ProductDetail/Vishay-Dale/CRCW040247K5FKED?qs=rzhQWu8UUS33UUFZR3Sagw%3D%3D
R9 R10: library part ERJ-3GEYJ472V, "Resistor", Manufacturer_Name=Panasonic, Mouser Part Number=667-ERJ-3GEYJ472V, Arrow Part Number=ERJ-3GEYJ472V, Arrow Price/Stock=https://www.arrow.com/en/products/erj-3geyj472v/panasonic?region=europe, Datasheet Link=http://docs-europe.electrocomponents.com/webdocs/13ba/0900766b813ba21b.pdf, Height=0.55mm, Manufacturer_Part_Number=ERJ-3GEYJ472V, Mouser Price/Stock=https://www.mouser.co.uk/ProductDetail/Panasonic/ERJ-3GEYJ472V?qs=5Z1f76oN9PODrqkF4KFDng%3D%3D
R11: library part RC0603FR-072K2L, "Resistor", Manufacturer_Name=KEMET, Mouser Part Number=603-RC0603FR-072K2L, Arrow Part Number=RC0603FR-072K2L, Arrow Price/Stock=https://www.arrow.com/en/products/rc0603fr-072k2l/yageo?region=nac, Datasheet Link=http://www.yageo.com/documents/recent/PYu-RC0603_51_RoHS_L_v5.pdf, Height=0.55mm, Manufacturer_Part_Number=RC0603FR-072K2L, Mouser Price/Stock=https://www.mouser.co.uk/ProductDetail/YAGEO/RC0603FR-072K2L?qs=diQw95jMAeOQmNpe2MM%252BPw%3D%3D
R12 R13: library part ERJ-3EKF1002V, "Resistor", Manufacturer_Name=Panasonic, Mouser Part Number=667-ERJ-3EKF1002V, Arrow Part Number=ERJ-3EKF1002V, Arrow Price/Stock=https://www.arrow.com/en/products/erj-3ekf1002v/panasonic?region=europe, Datasheet Link=http://industrial.panasonic.com/cdbs/www-data/pdf/RDA0000/AOA0000C86.pdf, Height=0.55mm, Manufacturer_Part_Number=ERJ-3EKF1002V, Mouser Price/Stock=https://www.mouser.co.uk/ProductDetail/Panasonic/ERJ-3EKF1002V?qs=H7k1u0Mp9JSrGPQ5%2F5COuw%3D%3D
S1 S2 S3 S4: "Switch", Manufacturer_Name=LITTELFUSE, Manufacturer_Part_Number="EL2 35 20J LFS", Datasheet Link=https://www.ckswitches.com/media/3758/el2.pdf, Height=3.7mm
U1: library part "2.4GHz Antenna"
Y1: "Crystal or Oscillator", Arrow Part Number="TSX-3225 24.0000MF20G-AC3", Manufacturer_Name="Epson Timing", Mouser Part Number=732-TX325-24F20G-AC3, Arrow Price/Stock=https://www.arrow.com/en/products/tsx-322524.0000mf20g-ac3/epson-electronics-america?region=nac, Datasheet Link=https://support.epson.biz/td/api/doc_check.php?dl=brief_FA-238V_en.pdf, Manufacturer_Part_Number="TSX-3225 24.0000MF20G-AC3", Mouser Price/Stock=https://www.mouser.co.uk/ProductDetail/Epson-Timing/TSX-3225-24.0000MF20G-AC3?qs=tC2qD9afNgou1YHpctmuPA%3D%3D
Y2: "Parallel - Fundamental Quartz Crystal, 0.032768MHz Nom", Manufacturer=Epson, Max Operating Temperature=85°C, Min Operating Temperature=-40°C, Operating Frequency-Nom=0.032768, Supplier Part Number=732-FC-12M32.768KAA5, Category=Crystals, ComponentLink1Description=https://datasheet.ciiva.com:443/pdfs/VipMasterIC/IC/SEIK/SEIK-S-A0008395574/SEIK-S-A0008395574-1.pdf?src-supplier=IHS+Markit, ComponentLink1URL=https://datasheet.ciiva.com:443/pdfs/VipMasterIC/IC/SEIK/SEIK-S-A0008395574/SEIK-S-A0008395574-1.pdf?src-supplier=IHS+Markit, ComponentLink2Description=https://datasheet.ciiva.com/12388/1407447-3083-12388132.pdf?src-supplier=Mouser, ComponentLink2URL=https://datasheet.ciiva.com/12388/1407447-3083-12388132.pdf?src-supplier=Mouser, Crystal/Resonator Type="PARALLEL - FUNDAMENTAL", JESD-609 Code=e4, Manufacturer Part Number=FC-12M32.7680KA-A5, Pricing="1=0.65, 10=0.506, 50=0.506, 100=0.455, 1000=0.39, 10000=0.366 (USD)", Reach SVHC Compliant=Yes, RoHS=Yes, RoHS Compliant=Yes, Stock=52995, Supplier=Mouser, Terminal Finish=Gold

## Free pads (board coordinates)
  round 118.11 hole 98.43: 2(94,95) 2(95,1659) 2(1724,95) 2(1724,1662)
  rect 43.31x43.31 smd: 2(105,220) 3(105,280) 4(100,1175) 5(100,1245)

## Via types
v1: diameter 11.81, hole 7.87, Top Layer to Bottom Layer, 383 vias
v2: diameter 16, hole 8, Top Layer to Bottom Layer, tented both sides, 95 vias
v3: diameter 28, hole 16, Top Layer to Bottom Layer, tented both sides, 24 vias

## Nets (pads, with @x,y where several pads share a name; then routed paths per layer and width w, separated by ;. In a path a pad name is that pad's centre, name@x,y a point inside that pad or via, vN(x,y) a via of type N, cw(c..) or ccw(c..) an arc to the next point about the centre after c; other vN are vias at no path point)
3V: C2.2 FB1.1 IC1.5 IC1.7 IC1.10 IC1.11 L1.2 R3.2 | length 1953.5
  Top Layer w10: IC1.11 361.38,312.24 361.38,334.38 391,364 ; IC1.10 381.06,312.24 381.06,332.06 391,342 391,364 ; v3(419,180) 419.26,180.26 419.26,228.4 IC1.5 ; IC1.7 439.21,338.21 ; L1.2@439.21,414.09 397.09,414.09 391,408 391,364
  Top Layer w20: v3(380,879.13) 381.53,880.66 412.94,880.66 430,897.72 430,931.38 433.62,935 R3.2 ; 439.21,338.21 439.21,414.09 L1.2 452.12,413 v3(491,413) 491.16,413 506.72,397.44 525.79,397.44 528.58,394.65 FB1.1 ; C2.2 v3(515,348.86)
  Layer 1 w30: v3(380,879.13) 334.86,879.13 285.99,928 184,928 119,863 119,539 223,435 469,435 v3(491,413) 491,410.84 513.47,388.37 513.47,350.39 v3(515,348.86) 515,276 v3(419,180)
6V: C1.2 C3.2 C4.2 C5.1 IC1.1 IC1.12 IC2.12 Q1.1 Q1.2 Q1.5 Q1.6 Q1.8 | length 2167.4
  Top Layer w10: C3.2 334.02,336.01 339.88,330.15 339.88,312.24 IC1.12 ; C4.2 268,1354.65 268,1337.86 273.86,1332 281.94,1332 287.8,1326.14 IC2.12 ; 310,190 330,190 340,200 340,227.87 IC1.1
  Top Layer w15: C4.2 268.35,1390.35 274.07,1396.07 C5.1 ; v3@288.28,290 300,278.28 300,200 310,190
  Top Layer w20: v3(232,1513) 233.53,1511.47 247.53,1511.47 271,1488 C5.1@271,1445.07 ; C1.2 248,291.07 289.35,291.07 v3(290.88,292.6)
  Layer 1 w50: v3(232,1513) 131,1513 46,1428 46,367 120.4,292.6 v3(290.88,292.6)
ADC_BATT: IC3.17 R1.2 R2.2 | length 1001.8
  Top Layer w10: R2.2 R1.2 434.41,85.59 v2(453,67) ; v2(434,716) 435.62,716 445.62,706 483.82,706 484.16,706.34 540.33,706.34 542.14,704.53 IC3.17
  Bottom Layer w10: v2(434,716) 417.48,716 410.51,709.03 373,671.52 373,353 453,273 v2(453,67)
CLK_32: IC3.8 IC4.6 | length 844
  Top Layer w10: v2(675.13,838.23) 675.3,838.06 675.3,811 IC3.8 ; v2(1161,1239) 1161,1237.39 1180.79,1217.6 IC4.6
  Bottom Layer w10: v2(675.13,838.23) 676.15,837.21 676.15,818.57 692.93,801.79 865.62,801.79 1160.66,1096.83 1160.66,1238.66 v2(1161,1239)
DCDC_SW: IC3.33 L2.1 | length 166.6
  Top Layer w10: 754.21,474.21 IC3.33
  Top Layer w15: L2.1 726.63,388.81 726.63,446.63 754.21,474.21
EN_BATT: IC1.4 IC3.16 | length 818.7
  Top Layer w10: v2(383,192) 383,192.65 398.94,208.59 398.94,227.76 IC1.4 ; v2(459.64,726.99) 462.41,724.21 IC3.16
  Bottom Layer w10: v2(383,192) 339,236 339,373 357,391 357,706.13 393.87,743 443.12,743 459.13,726.99 v2(459.64,726.99)
EN_LED: IC3.7 IC4.5 R11.1 | length 1802
  Top Layer w10: R11.1 294.18,715 v2(339,715) ; v2(694,882.75) 694,851.78 696.01,849.77 696.01,812.35 IC3.7@695.16,811.51 ; v2(1167.74,1261.9) 1168.88,1260.76 1177.91,1260.76 1183.75,1254.92 1184.36,1254.92 1200.47,1238.81 IC4.5
  Layer 2 w10: v2(339,715) 244,715 223,736 223,879 303,959 623.14,959 692.85,889.29 692.85,883.9 v2(694,882.75)
  Bottom Layer w10: v2(694,882.75) 694,850.96 696.01,848.95 696.01,832.46 708.8,819.66 858.22,819.66 1123.11,1084.56 1123.11,1240.11 1143.76,1260.76 1166.59,1260.76 v2(1167.74,1261.9)
GND: C1.1 C2.1 C3.1 C5.2 C6.1 C7.1 C8.1 C9.1 C10.1 C11.1 C12.1 C13.1 C14.1 C15.1 C16.1 C17.1 C18.1 C19.1 C20.1 C21.1 C22.2 C23.1 C25.1 C28.1 C29.1 C30.1 C31.1 C32.2 C35.1 D1.2 D2.2 D3.2 IC1.3 IC1.8 IC1.9 IC1.13 IC2.13 IC3.49 IC4.4 IC4.20 IC4.21 IC4.25 J1.3 J1.5 J1.9 LED1.4 LED2.4 pad.2 Q1.3 R2.1 R4.1 S1.2 S1.3 S2.2 S2.3 S3.2 S3.3 S4.2 S4.3 U1.2 Y1.2 Y1.4 | length 175.6
  Top Layer w10: C35.1 1197.35,1276.06 1220.16,1253.25 IC4.4 ; IC4.20 1352.13,1100.47 1356.26,1096.35 C32.2
  other v1: 80,20 160,20 240,20 320,20 400,20 480,20 560,20 640,20 720,20 800,20 880,20 960,20 1040,20 1120,20 1200,20 1280,20 1360,20 1440,20 1520,20 1600,20 1680,20 240,100 320,100 400,100 480,100 560,100 640,100 720,100 800,100 880,100 80,180 160,180 240,180 560,180 640,180 1520,180 1680,180 1760,180 1127.43,202.47 640,260 880,260 960,260 1440,260 1520,260 1600,260 1680,260 1760,260 1259.43,320.47 1040,340 1520,340 1600,340 1680,340 1760,340 1520,420 1600,420 1680,420 1760,420 1600,500 1680,500 1760,500 851.43,527.47 1600,580 1680,580 1760,580 1600,660 1680,660 1760,660 1111.77,682.47 1200,740 1600,740 1680,740 1760,740 1200,820 1600,820 1680,820 1760,820 995.43,883.47 1600,900 1680,900 1760,900 240,980 720,980 880,980 1360,980 1600,980 1680,980 1760,980 160,1060 720,1060 880,1060 1040,1060 1600,1060 1680,1060 1760,1060 480,1140 560,1140 720,1140 880,1140 960,1140 1600,1140 1680,1140 1760,1140 560,1220 720,1220 880,1220 960,1220 1040,1220 1600,1220 1680,1220 1760,1220 243.43,1240.47 160,1300 720,1300 880,1300 960,1300 1040,1300 1120,1300 1520,1300 1600,1300 1680,1300 1760,1300 320,1380 720,1380 880,1380 960,1380 1040,1380 1120,1380 1200,1380 1280,1380 1360,1380 1520,1380 1600,1380 1680,1380 1760,1380 320,1460 400,1460 480,1460 560,1460 640,1460 720,1460 880,1460 960,1460 1040,1460 1120,1460 1200,1460 1280,1460 1360,1460 1440,1460 1520,1460 1600,1460 1680,1460 1760,1460 328,1508 348,1508 368,1508 388,1508 408,1508 428,1508 448,1508 468,1508 488,1508 508,1508 528,1508 548,1508 568,1508 588,1508 608,1508 628,1508 648,1508 668,1508 688,1508 708,1508 728,1508 748,1508 768,1508 828,1508 848,1508 868,1508 888,1508 908,1508 928,1508 948,1508 968,1508 988,1508 1008,1508 1028,1508 1048,1508 1068,1508 1088,1508 1108,1508 1128,1508 1148,1508 1168,1508 1188,1508 1208,1508 1228,1508 1248,1508 1268,1508 1288,1508 1308,1508 1328,1508 1348,1508 1368,1508 1388,1508 1408,1508 1428,1508 1448,1508 1468,1508 1488,1508 1508,1508 1528,1508 1548,1508 308,1528 328,1528 348,1528 368,1528 388,1528 408,1528 428,1528 448,1528 468,1528 488,1528 508,1528 528,1528 548,1528 568,1528 588,1528 608,1528 628,1528 648,1528 668,1528 748,1528 768,1528 828,1528 848,1528 868,1528 888,1528 908,1528 928,1528 948,1528 968,1528 988,1528 1008,1528 1028,1528 1048,1528 1068,1528 1088,1528 1108,1528 1128,1528 1148,1528 1168,1528 1188,1528 1208,1528 1228,1528 1248,1528 1268,1528 1288,1528 1308,1528 1328,1528 1348,1528 1368,1528 1388,1528 1408,1528 1428,1528 1448,1528 1468,1528 1488,1528 1508,1528 1528,1528 1548,1528 1600,1540 1680,1540 1760,1540 288,1548 308,1548 328,1548 348,1548 368,1548 388,1548 408,1548 428,1548 448,1548 468,1548 488,1548 508,1548 528,1548 548,1548 568,1548 588,1548 608,1548 628,1548 648,1548 668,1548 748,1548 768,1548 828,1548 848,1548 868,1548 888,1548 908,1548 928,1548 948,1548 968,1548 988,1548 1008,1548 1028,1548 1048,1548 1068,1548 1088,1548 1108,1548 1128,1548 1148,1548 1168,1548 1188,1548 1208,1548 1228,1548 1248,1548 1268,1548 1288,1548 1308,1548 1328,1548 1348,1548 1368,1548 1388,1548 1408,1548 1428,1548 1448,1548 1468,1548 1488,1548 1508,1548 1528,1548 1548,1548 288,1568 308,1568 1508,1568 1528,1568 1548,1568 288,1588 308,1588 1508,1588 1528,1588 1548,1588 288,1608 308,1608 1508,1608 1528,1608 1548,1608 160,1620 240,1620 1600,1620 288,1628 308,1628 1508,1628 1528,1628 1548,1628 288,1648 308,1648 1508,1648 1528,1648 1548,1648 288,1668 308,1668 1508,1668 1528,1668 1548,1668 288,1688 308,1688 1508,1688 1528,1688 1548,1688 160,1700 240,1700 1600,1700 288,1708 308,1708 1508,1708 1528,1708 1548,1708 288,1728 308,1728 1508,1728 1528,1728 1548,1728
  other v2: 358,269 390.4,269 422.8,269 623,602.13 655.4,602.13 687.8,602.13 720.2,602.13 752.6,602.13 785,602.13 624,646 656.4,646 688.8,646 721.2,646 753.6,646 786,646 625,691 657.4,691 689.8,691 722.2,691 754.6,691 787,691 625,725 657.4,725 689.8,725 722.2,725 754.6,725 787,725 626,758 658.4,758 690.8,758 723.2,758 755.6,758 788,758 1198,1093 1230.4,1093 1262.8,1093 1198,1118 1230.4,1118 1262.8,1118 1198,1141 1230.4,1141 1262.8,1141 1198,1166 1230.4,1166 1262.8,1166
  other v3: 716,1546
IN1: IC2.9 IC2.16 IC3.14 | length 1067.6